# Altium PCB RcMPPT-SCC.PcbDoc (part 1 of 2)
Units mm, origin at the board's own origin, x right, y up, seen from the top; angles counter-clockwise.
Board outline 99.06 x 55.88 mm, 4 copper layers (Top Layer, Mid Layer 1, Mid Layer 2, Bottom Layer), stack 1.57 mm thick; 95 components, 80 nets, 471 pads, 150 vias.
Unrouted connection lines stored in the file: 61.
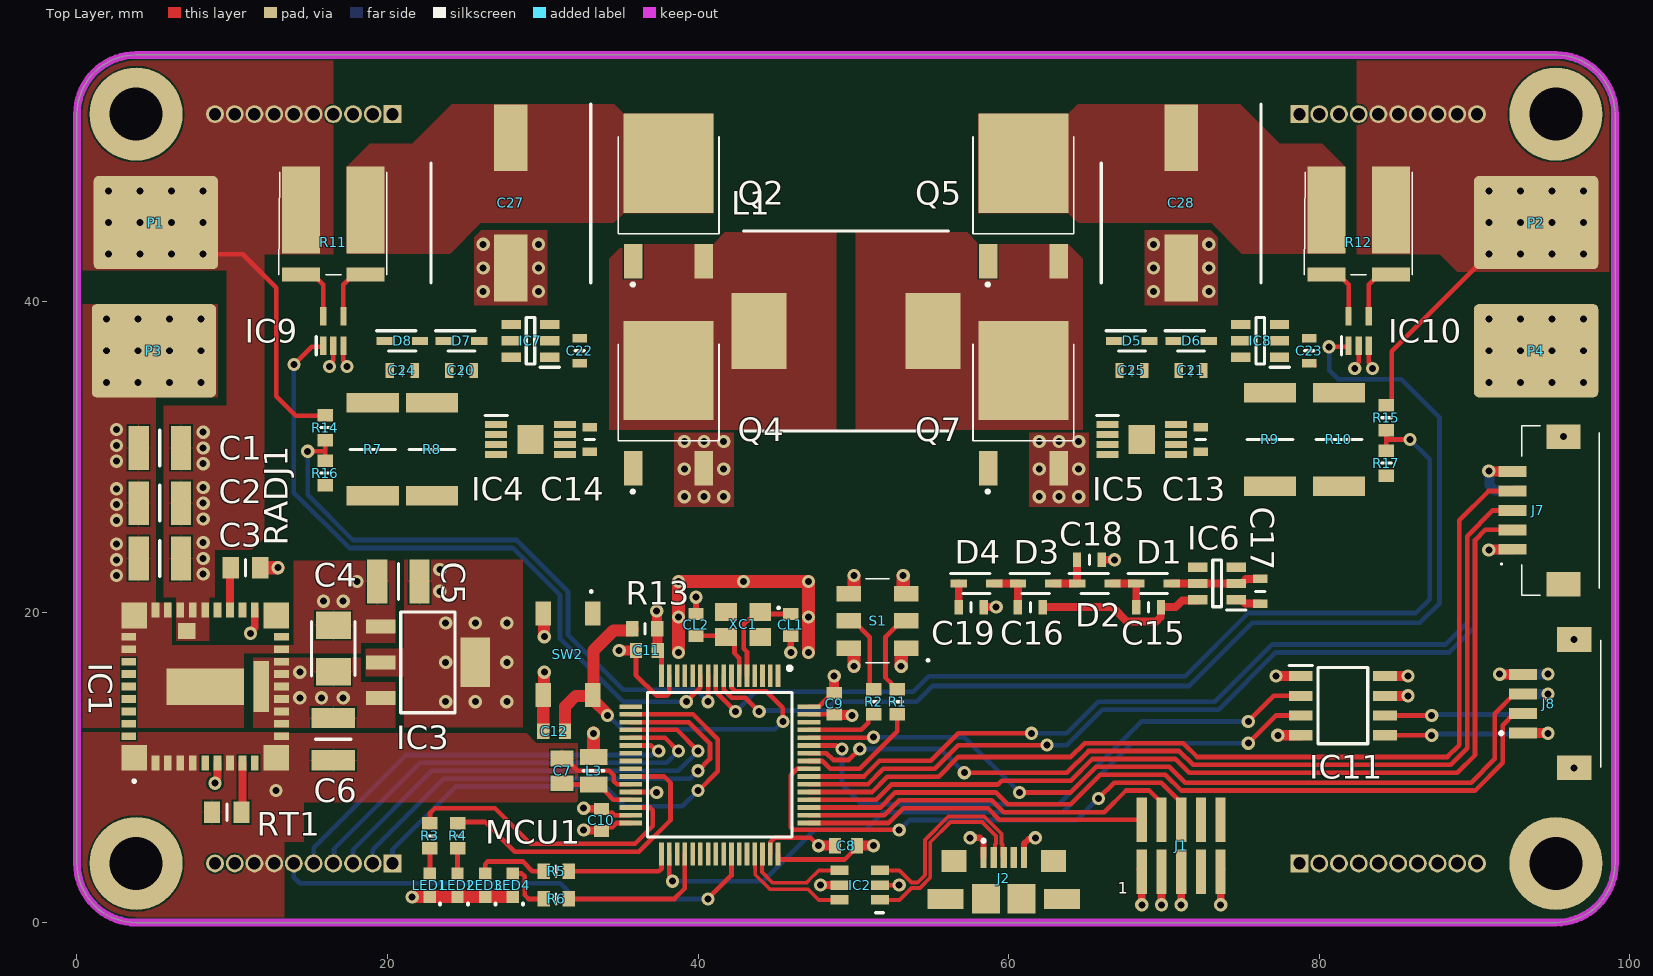
[diagram p0: Top Layer view]
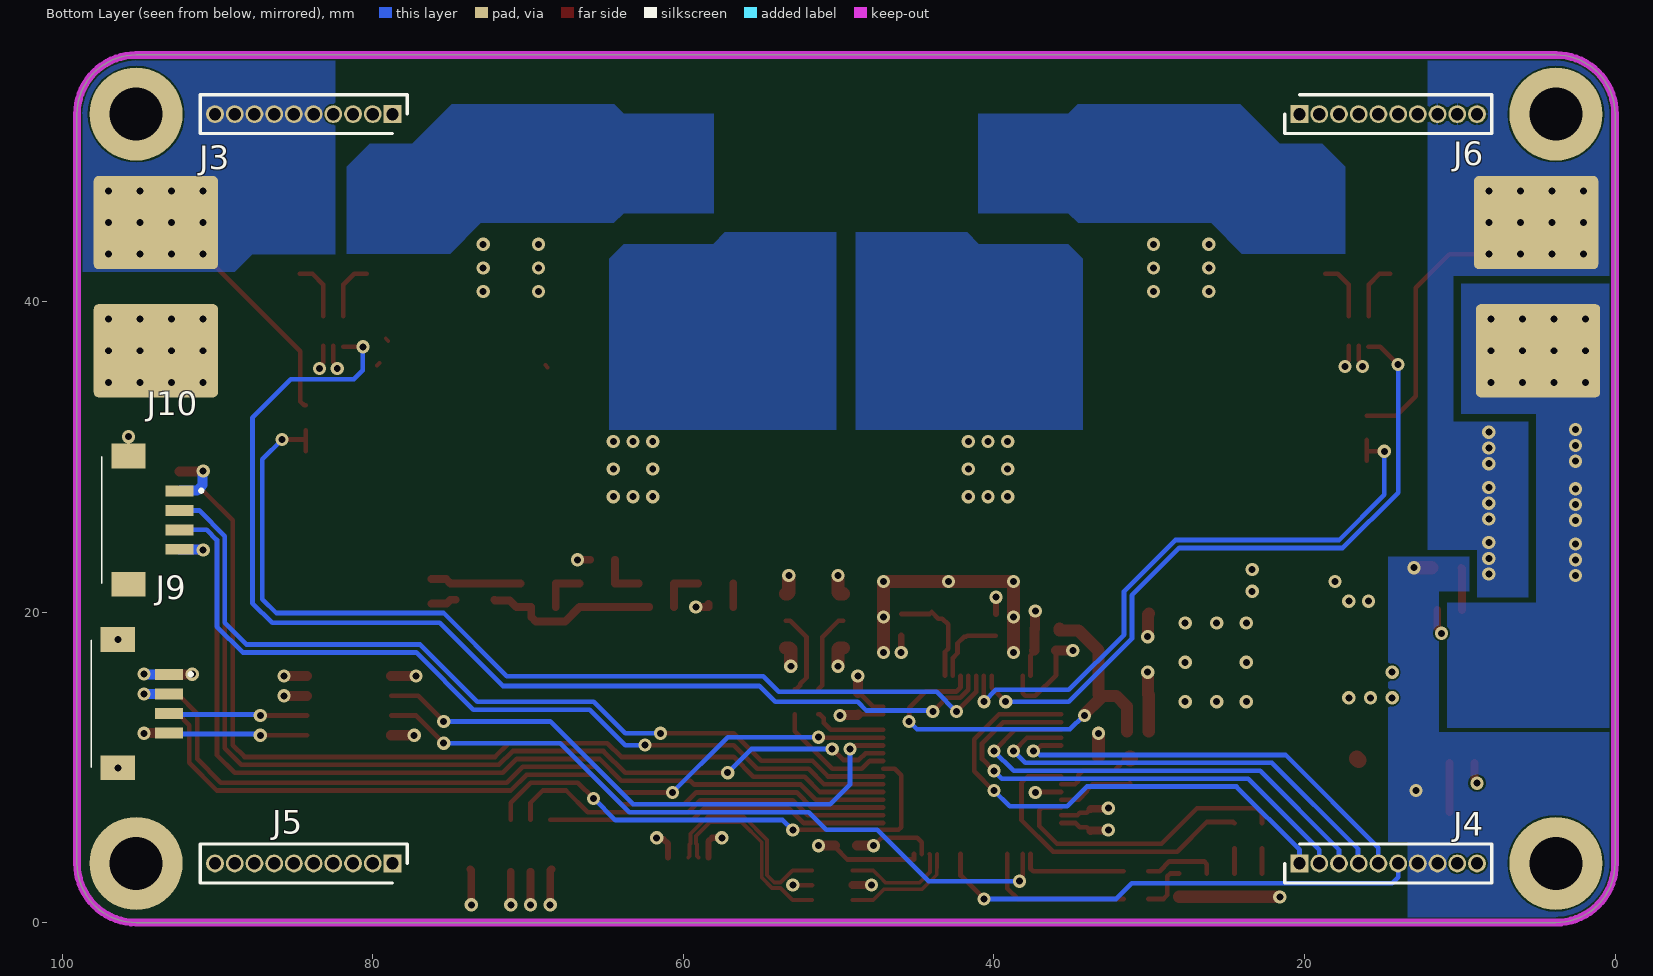
[diagram p1: Bottom Layer view, seen from below]
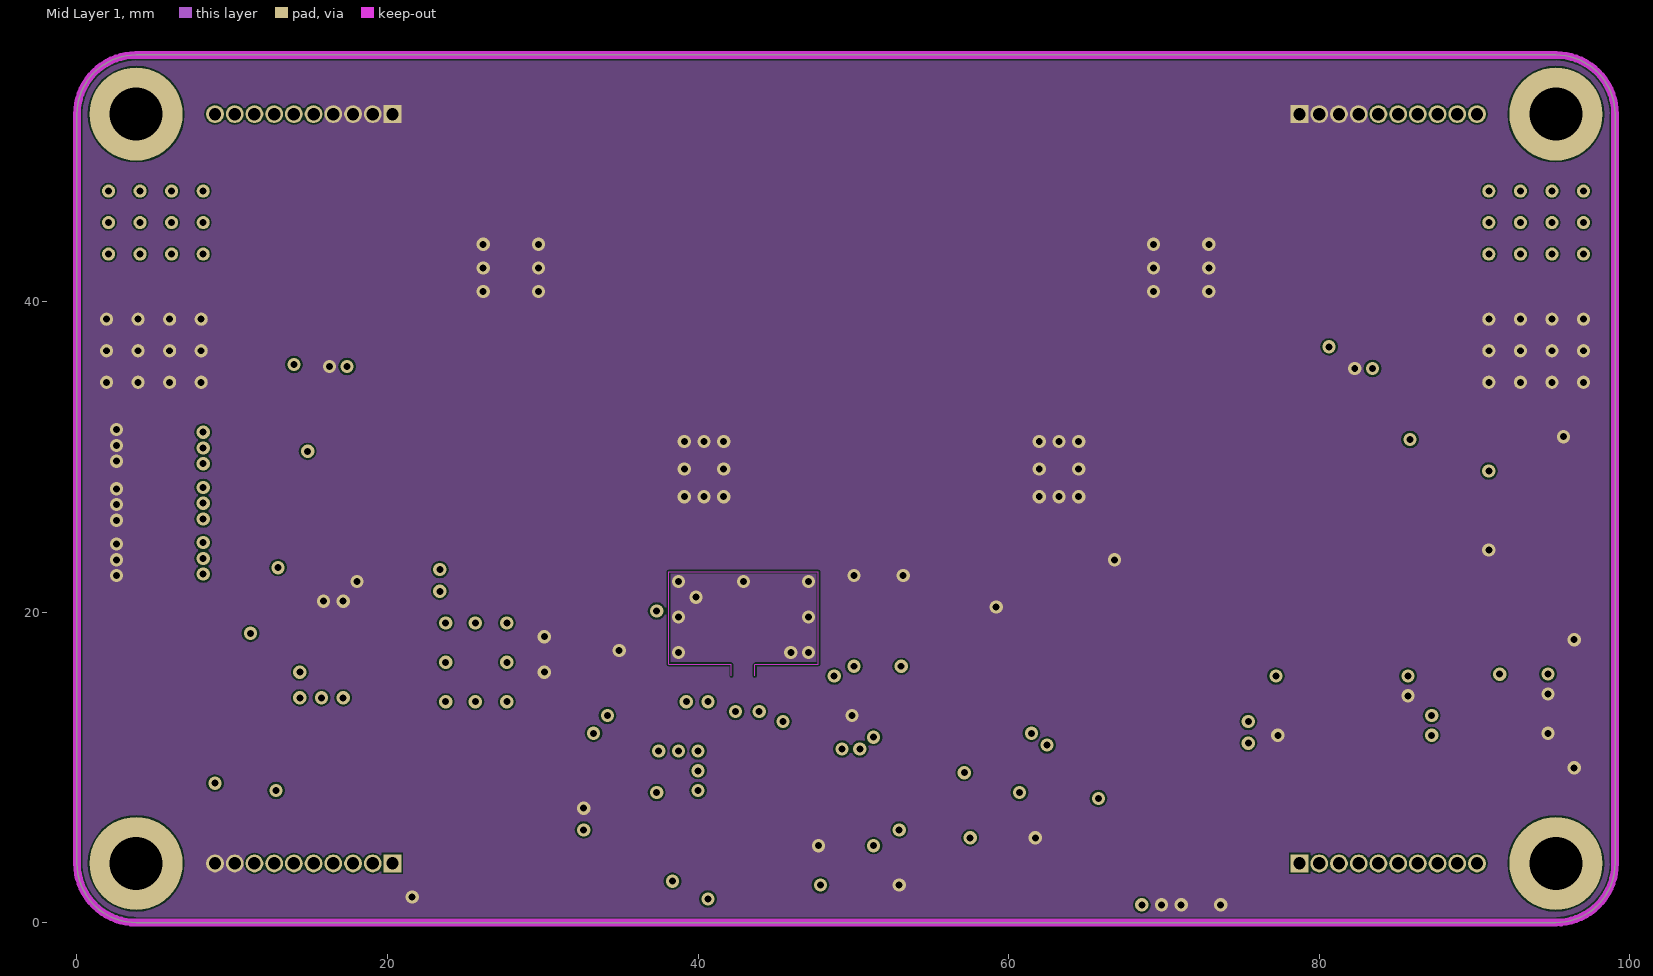
[diagram p2: Mid Layer 1]
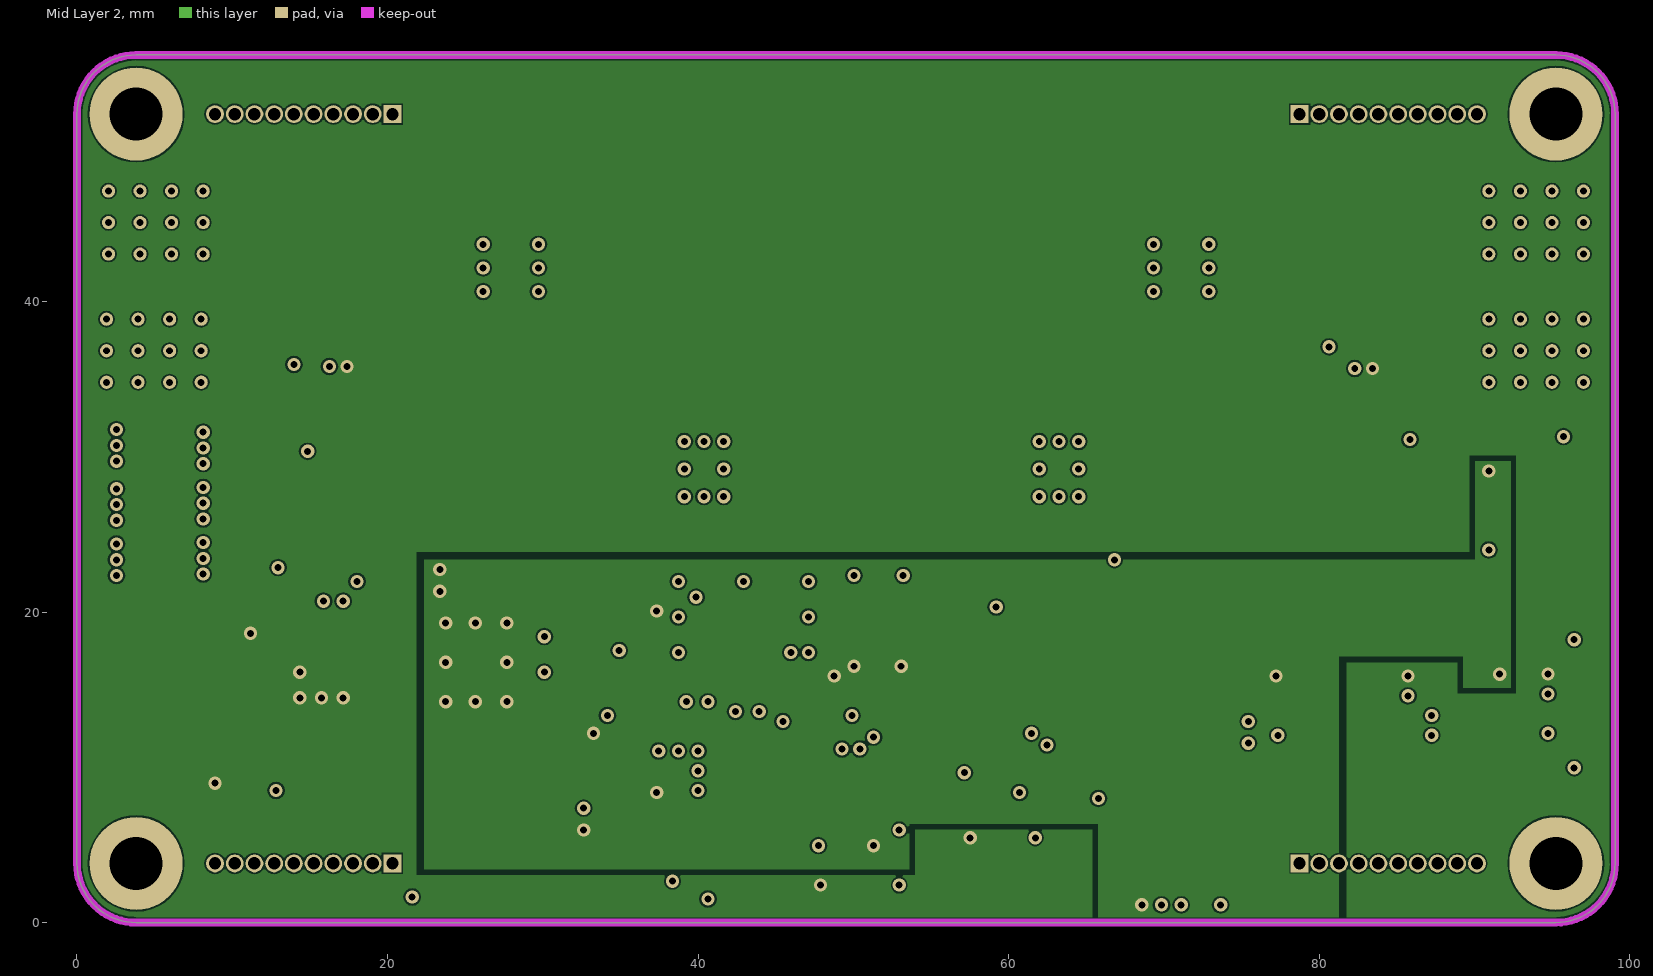
[diagram p3: Mid Layer 2]
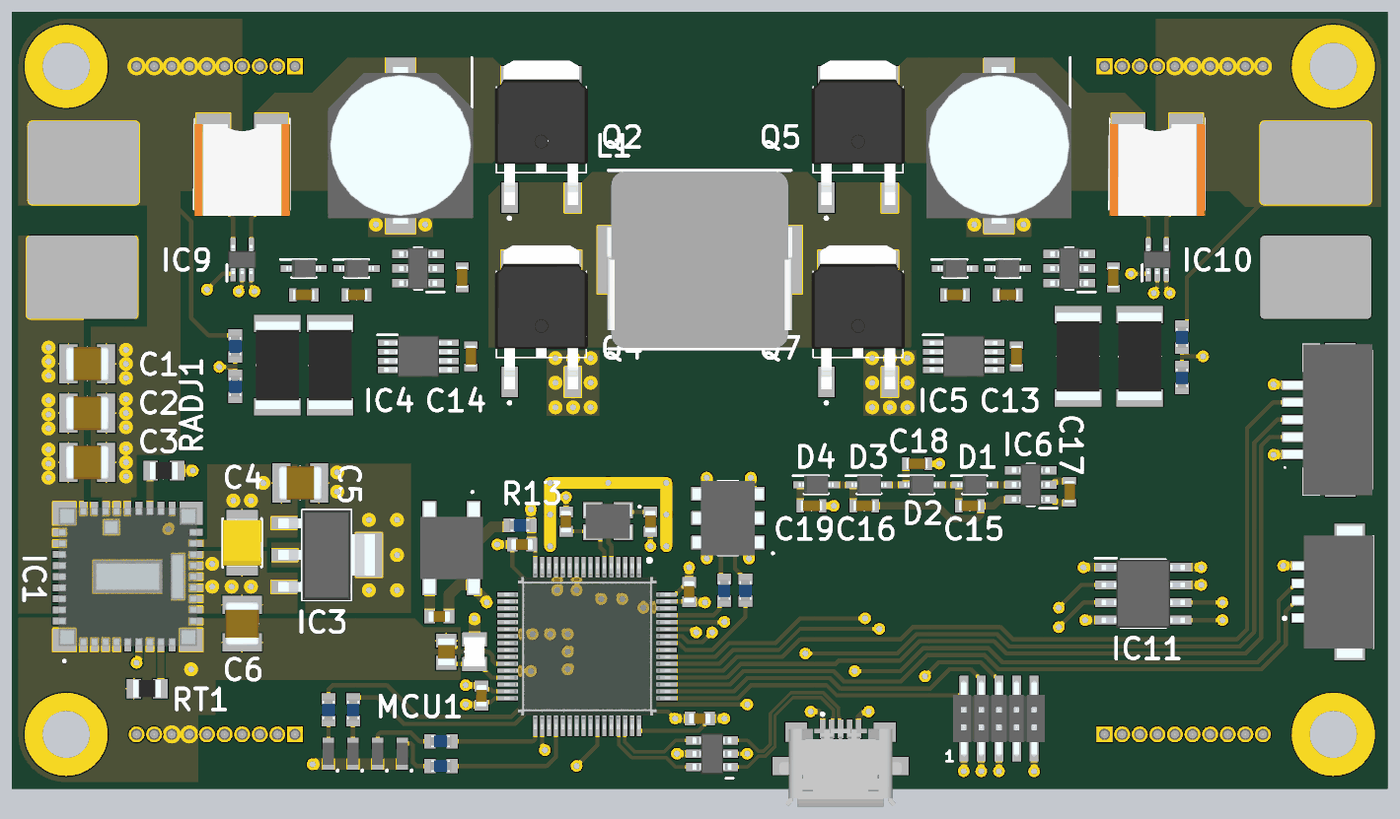
[diagram p4: 3D render of the assembled board from above, using the file's embedded part models]
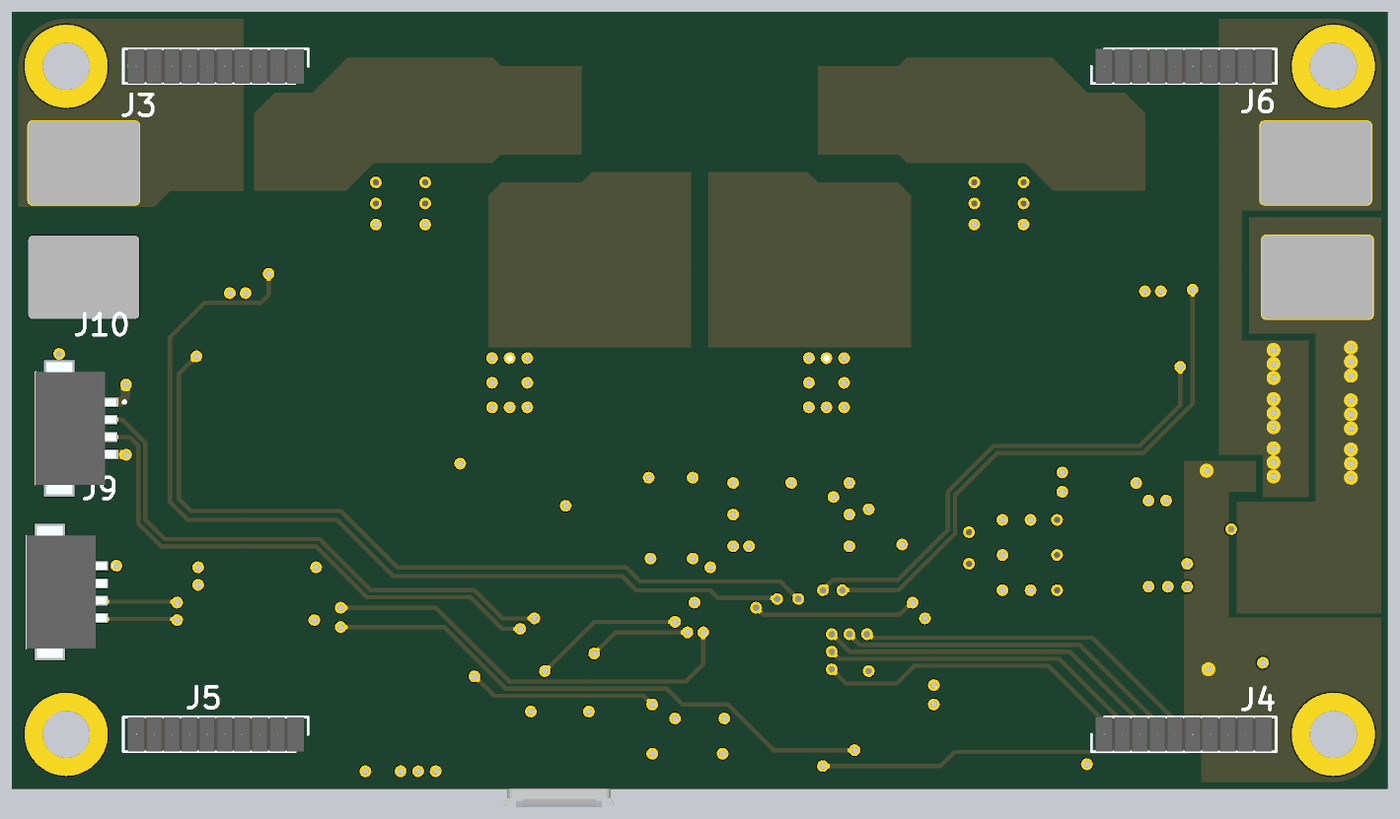
[diagram p5: 3D render of the assembled board from below, using the file's embedded part models]

## Layer stack, top to bottom
Top Solder: solder mask 0.0127, Solder Resist, Dk 3.8
Top Layer: signal copper 0.035
Dielectric 1: prepreg 0.2, 7628, Dk 4.6
Mid Layer 1: signal copper 0.0175
Core: core 1.065, FR-4, Dk 4.5
Mid Layer 2: signal copper 0.0175
Dielectric 2: prepreg 0.2, 7628, Dk 4.6
Bottom Layer: signal copper 0.035
Bottom Solder: solder mask 0.0127, Solder Resist, Dk 3.8

## Board outline
0,3.81 ccw(c3.81,3.81) 3.81,0 95.25,0 ccw(c95.25,3.81) 99.06,3.81 99.06,52.07 ccw(c95.25,52.07) 95.25,55.88 3.81,55.88 ccw(c3.81,52.07) 0,52.07

## Design rules (kind name [scope] priority, off if disabled: settings)
BoardOutlineClearance [All] p1: gap=0.2 ignorepadtopadclearanceinfootprint=FALSE
Clearance [All] p1: gap=0.102 ignorepadtopadclearanceinfootprint=FALSE except(0.127: Arc-Via Track-Via SMDPad-Via THPad-Via Via-Via Via-Fill Via-Poly Via-Region Via-Text; 0.25: Arc-Hole Track-Hole SMDPad-Hole THPad-Hole Via-Hole Fill-Hole Poly-Hole Region-Hole Text-Hole)
ComponentClearance [All] p1: gap=0.102 collisioncheckmode=3 verticalgap=0.102 showdistances=TRUE
DiffPairsRouting "Schematic Differential Pairs Routing_1" [InNet('USB-Con-D_N')] p1: maxlimit=0.254 minlimit=0.1 mostfreqgap=0.178 toplayer_minwidth=0.1 toplayer_maxwidth=0.381 toplayer_prefwidth=0.247 midlayer1_minwidth=0.1 midlayer1_maxwidth=0.381 midlayer1_prefwidth=0.247 midlayer2_minwidth=0.1 midlayer2_maxwidth=0.381 midlayer2_prefwidth=0.247 bottomlayer_minwidth=0.1 bottomlayer_maxwidth=0.381 bottomlayer_prefwidth=0.247 maxuncoupledlength=12.7
DiffPairsRouting "Schematic Differential Pairs Routing" [InNet('USB-D_P')] p2: maxlimit=0.254 minlimit=0.1 mostfreqgap=0.178 toplayer_minwidth=0.1 toplayer_maxwidth=0.381 toplayer_prefwidth=0.247 midlayer1_minwidth=0.1 midlayer1_maxwidth=0.381 midlayer1_prefwidth=0.247 midlayer2_minwidth=0.1 midlayer2_maxwidth=0.381 midlayer2_prefwidth=0.247 bottomlayer_minwidth=0.1 bottomlayer_maxwidth=0.381 bottomlayer_prefwidth=0.247 maxuncoupledlength=12.7
DiffPairsRouting [All] p3: maxlimit=0.102 minlimit=0.102 mostfreqgap=0.102 toplayer_minwidth=0.102 toplayer_maxwidth=1816.048 toplayer_prefwidth=0.102 midlayer1_minwidth=0.102 midlayer1_maxwidth=1816.048 midlayer1_prefwidth=0.102 midlayer2_minwidth=0.102 midlayer2_maxwidth=1816.048 midlayer2_prefwidth=0.102 bottomlayer_minwidth=0.102 bottomlayer_maxwidth=1816.048 bottomlayer_prefwidth=0.102 maxuncoupledlength=12.7
Height [All] p1: minheight=0 maxheight=1816.048 prefheight=12.7
HoleSize [All] p1: absolutevalues=TRUE maxlimit=6.3 minlimit=0.2 maxpercent=80.000 minpercent=20.000
HoleToHoleClearance [All] p1: gap=0.25 allowstackedmicrovias=FALSE
MinimumAnnularRing [All] p1: minimumring=0.076
MinimumSolderMaskSliver [All] p1: minsoldermaskwidth=0
PlaneClearance [All] p1: clearance=0.102
PlaneConnect PlaneConnectPowerPads [InPadClass('PowerPads')] p1: planeconnectstyle=Direct reliefexpansion=0.508 reliefentries=4 reliefconductorwidth=0.254 reliefairgap=0.254
PlaneConnect [All] p2: pad.planeconnectstyle=Relief pad.reliefexpansion=0.3 pad.reliefentries=4 pad.reliefconductorwidth=0.102 pad.reliefairgap=0.102 via.planeconnectstyle=Direct via.reliefexpansion=0.3 via.reliefentries=4 via.reliefconductorwidth=0.127 via.reliefairgap=0.127
PolygonConnect PolygonConnectPowerPads [All vs (InPadClass('PowerPads'))] p1: connectstyle=Direct reliefconductorwidth=0.254 reliefentries=4 polygonreliefangle="90 Angle" airgapwidth=0.254
PolygonConnect [All] p2: thpad.connectstyle=Relief thpad.reliefconductorwidth=0.102 thpad.reliefentries=4 thpad.polygonreliefangle="90 Angle" thpad.airgapwidth=0.102 smdpad.connectstyle=Relief smdpad.reliefconductorwidth=0.102 smdpad.reliefentries=4 smdpad.polygonreliefangle="90 Angle" smdpad.airgapwidth=0.102 via.connectstyle=Direct via.reliefconductorwidth=0.127 via.reliefentries=4 via.polygonreliefangle="90 Angle" via.airgapwidth=0.127
RoutingVias [All] p1: holewidth=0.2 width=0.45 viastyle="Through Hole" minholewidth=0.2 minwidth=0.45 maxholewidth=6.3 maxwidth=6.55
SilkToSilkClearance [All] p1: silktosilkclearance=0
SilkToSolderMaskClearance [IsPad] p1: minsilkscreentomaskgap=0.102 clearancetoexposedcopper=TRUE
SolderMaskExpansion [All] p1: expansion=0.075 istentingtop=FALSE
Width [All] p1: maxlimit=1816.048 minlimit=0.102 preferedwidth=0.102
20 further rules are at their usual default settings.

## Classes and differential pairs
component class RcMPPT-IO: IC11 J3 J4 J5 J6 J7 J8 J9 J10
component class RcMPPT-DCDC: C13 C14 C15 C16 C17 C18 C19 C20 C21 C22 C23 C24 C25 C27 C28 D1 D2 D3 D4 D5 D6 D7 D8 IC4 IC5 IC6 IC7 IC8 IC9 IC10 L1 P1 P2 P3 P4 Q2 Q4 Q5 Q7 R7 R8 R9 R10 R11 R12 R14 R15 R16 R17
component class RcMPPT-MCU: C7 C8 C9 C10 C11 C12 CL1 CL2 IC2 J1 J2 L3 LED1 LED2 LED3 LED4 MCU1 R1 R2 R3 R4 R5 R6 R13 S1 SW2 XC1
component class RcMPPT-Power_Module: C1 C2 C3 C4 C5 C6 IC1 IC3 RADJ1 RT1
differential pair USB-Con-D: +USB-Con-D_P -USB-Con-D_N
differential pair USB-D: +USB-D_P -USB-D_N

## Components (designator, comment, footprint, x,y, rotation, side; value= is the part's Value field where it differs from the comment)
C1 "10uF" CAPC3225X280N 5.334,30.57 r180 top
C2 "10uF" CAPC3225X280N 5.334,27.014 r180 top
C3 "10uF" CAPC3225X280N 5.334,23.458 r180 top
C4 "100uF" CAPPM3528X200N 16.51,17.653 r90 top
C5 "10uF" CAPC3225X280N 20.701,21.971 r180 top
C6 "10uF" CAPC3225X280N 16.51,11.811 r270 top
C7 "10nF" CAPC2012X88N 31.242,9.779 r90 top
C8 "100nF" CAPC1608X97N 49.53,4.953 r180 top
C9 "100nF" CAPC1608X97N 48.768,14.097 r270 top
C10 "100nF" CAPC1608X97N 33.782,6.604 r90 top
C11 "100nF" CAPC1608X97N 36.703,17.526 r180 top
C12 "100nF" CAPC1608X97N 30.734,12.319 r180 top
C13 "C1608X5R1E335K080AC" CAPC1608X90N 72.39,31.115 r90 top
C14 "C1608X5R1E335K080AC" CAPC1608X90N 33.02,31.115 r90 top
C15 "C1608X5R1E335K080AC" CAPC1608X90N 69.02,20.32 r180 top
C16 "C1608X5R1E335K080AC" CAPC1608X90N 61.4,20.32 r180 top
C17 "C1608X5R1E335K080AC" CAPC1608X90N 76.221,21.336 r270 top
C18 "C1608X5R1E335K080AC" CAPC1608X90N 65.21,23.368 r0 top
C19 "C1608X5R1E335K080AC" CAPC1608X90N 57.59,20.32 r0 top
C20 "C1608X5R1E335K080AC" CAPC1608X90N 24.765,35.56 r180 top
C21 "C1608X5R1E335K080AC" CAPC1608X90N 71.755,35.56 r180 top
C22 "C1608X5R1E335K080AC" CAPC1608X90N 32.385,36.83 r270 top
C23 "C1608X5R1E335K080AC" CAPC1608X90N 79.375,36.83 r270 top
C24 "C1608X5R1E335K080AC" CAPC1608X90N 20.955,35.56 r0 top
C25 "C1608X5R1E335K080AC" CAPC1608X90N 67.945,35.56 r0 top
C27 "UUX2A470MNL1GS" CAPAE1030X1050N 27.94,46.355 r270 top
C28 "UUX2A470MNL1GS" CAPAE1030X1050N 71.12,46.355 r270 top
CL1 "6.8pF" CAPC1608X87N 45.974,19.177 r90 top
CL2 "6.8pF" CAPC1608X87N 39.878,19.177 r270 top
D1 "BAS3010A03WE6327HTSA1" SOD2513X110N 69.363,21.844 r0 top
D2 "BAS3010A03WE6327HTSA1" SOD2513X110N 65.553,21.844 r0 top
D3 "BAS3010A03WE6327HTSA1" SOD2513X110N 61.743,21.844 r0 top
D4 "BAS3010A03WE6327HTSA1" SOD2513X110N 57.933,21.844 r0 top
D5 "BAS3010A03WE6327HTSA1" SOD2513X110N 67.945,37.465 r0 top
D6 "BAS3010A03WE6327HTSA1" SOD2513X110N 71.755,37.465 r0 top
D7 "BAS3010A03WE6327HTSA1" SOD2513X110N 24.765,37.465 r0 top
D8 "BAS3010A03WE6327HTSA1" SOD2513X110N 20.955,37.465 r0 top
IC1 "LMZ36002RVQT" LMZ36002RVQR 8.255,15.203 r0 top
IC2 "USBLC6-2SC6" SOT95P280X145-6N 50.419,2.413 r180 top
IC3 "AP2114H-3.3TRG1" SOT230P700X180-4N 22.606,16.764 r0 top
IC4 "LTC4444EMS8E-5#PBF" SOP65P490X110-9N 29.21,31.115 r0 top
IC5 "LTC4444EMS8E-5#PBF" SOP65P490X110-9N 68.58,31.115 r0 top
IC6 "NCP1729SN35T1G" SOT105P275X110-6N 73.427,21.844 r180 top
IC7 "NCP1729SN35T1G" SOT105P275X110-6N 29.21,37.465 r180 top
IC8 "NCP1729SN35T1G" SOT105P275X110-6N 76.2,37.465 r180 top
IC9 "INA290A2IDCKT" SOT65P210X110-5N 16.51,38.1 r90 top
IC10 "INA290A2IDCKT" SOT65P210X110-5N 82.55,38.1 r90 top
IC11 "ISO1044BDR" SOIC127P600X175-8N 81.534,13.97 r0 top
J1 "SWD" HUSSP10W40P127_2X5_635X340X420P 71.12,4.953 r0 top
J2 "Micro-USB" 19815841 59.69,1.524 r0 top
J3 "M52-040023V1045" HDRV10W60P0X127_1X10_1270X250X250P 78.74,52.07 r0 bottom locked
J4 "M52-040023V1045" HDRV10W60P0X127_1X10_1270X250X250P 20.32,3.81 r180 bottom locked
J5 "M52-040023V1045" HDRV10W60P0X127_1X10_1270X250X250P 78.74,3.81 r0 bottom locked
J6 "M52-040023V1045" HDRV10W60P0X127_1X10_1270X250X250P 20.32,52.07 r180 bottom locked
J7 "DF13A-5P-1.25H_21_" DF13A5P125H21 95.25,26.543 r270 top
J8 "DF13A-4P-1.25H_21_" DF13A4P125H21 95.631,14.097 r270 top
J9 "DF13A-4P-1.25H_21_" DF13A4P125H21 95.631,14.097 r90 bottom
J10 "DF13A-4P-1.25H_21_" DF13A4P125H21 94.95,25.918 r90 bottom
L1 "IHLP5050FDER2R2M01" INDPM132129X650N 49.53,38.1 r0 top
L3 "39nH" LQW2BAN11NG00L 33.274,9.779 r270 top
LED1 "Green" LGQ396PS35 22.733,2.413 r90 top
LED2 "Green" LGQ396PS35 24.511,2.413 r90 top
LED3 "Green" LGQ396PS35 26.289,2.413 r90 top
LED4 "Green" LGQ396PS35 28.067,2.413 r90 top
MCU1 "STM32G474RBT6" QFP50P1200X1200X160-64N 41.402,10.16 r270 top
P1 "PowerPad" POWER_PAD 5.08,45.085 r0 top
P2 "PowerPad" POWER_PAD 93.98,45.085 r0 top
P3 "PowerPad" POWER_PAD 4.953,36.83 r0 top
P4 "PowerPad" POWER_PAD 93.98,36.83 r0 top
Q2 "IPD90N10S4L06ATMA1" IPD90N10S4L06ATMA1 38.1,52.095 r0 top
Q4 "IPD90N10S4L06ATMA1" IPD90N10S4L06ATMA1 38.1,38.76 r0 top
Q5 "IPD90N10S4L06ATMA1" IPD90N10S4L06ATMA1 60.96,52.095 r0 top
Q7 "IPD90N10S4L06ATMA1" IPD90N10S4L06ATMA1 60.96,38.76 r0 top
R1 "10k" RESC1608X55N 52.832,14.224 r270 top
R2 "10k" RESC1608X55N 51.308,14.224 r270 top
R3 "1k" RESC1608X55N 22.733,5.588 r270 top
R4 "1k" RESC1608X55N 24.511,5.588 r270 top
R5 "1k" RESC1608X55N 30.861,3.302 r180 top
R6 "1k" RESC1608X55N 30.861,1.524 r180 top
R7 "CRCW25128K20JNEG" RESC6332X70N 19.05,30.48 r270 top
R8 "CRCW25128K20JNEG" RESC6332X70N 22.86,30.48 r270 top
R9 "CRCW25128K20JNEG" RESC6332X70N 76.835,31.115 r270 top
R10 "CRCW25128K20JNEG" RESC6332X70N 81.28,31.115 r270 top
R11 "WSL2726L5000FEB" WSL2726L5000FEB 16.51,43.815 r270 top
R12 "WSL2726L5000FEB" WSL2726L5000FEB 82.55,43.815 r270 top
R13 "10k" RESC1608X55N 36.576,18.923 r180 top
R14 "1k" RESC1608X55N 16.002,31.877 r270 top
R15 "1k" RESC1608X55N 84.328,32.512 r270 top
R16 "1k" RESC1608X55N 16.002,28.956 r270 top
R17 "1k" RESC1608X55N 84.328,29.591 r270 top
RADJ1 "5.05k" R0805 10.856,22.86 r0 top
RT1 "49.9k" R0805 9.652,7.112 r180 top
S1 "CAS-D20A1" CASD20A1 51.562,19.431 r90 top
SW2 "RST" PTS647SK38SMTR2LFS 31.623,17.272 r270 top
XC1 "ABM8W-24.0000MHZ-8-B1U-T3" ABM8W240000MHZ8B1UT3 42.901,19.202 r180 top

## Footprints (in the part's own frame and the unit in brackets; to place one, negate y for a bottom-side part, rotate by r counter-clockwise, add the part's x,y. Pads: shape width x height; smd on the part's side, far side on the other; paste and mask are expansions set on the pad)
19815841 [mm]
  rect 0.4x1.35 smd: 1(-1.3,2.675) 2(-0.65,2.675) 3(0,2.675) 4(0.65,2.675) 5(1.3,2.675)
  rect 1.6x1.4 smd: 6(-3.2,2.45) 7(3.2,2.45)
  rect 2.3x1.3 smd: 8(-3.75,0) 9(3.75,0)
  rect 1.8x1.9 smd: 10(-1.15,0) 11(1.15,0)
  silkscreen extent -1.4,3.65 -1.2,3.85, body extent -4.4,-2.93 4.4,2.68, height 2.8
ABM8W240000MHZ8B1UT3 [mm]
  rect 1.4x1.15 smd: 1(-1.1,-0.8) 2(1.1,-0.8) 3(1.1,0.8) 4(-1.1,0.8)
  silkscreen extent -2.34,-1.12 -2.24,-1.02, body extent -1.69,-1.26 1.69,1.26, height 0.85
CAPAE1030X1050N [mm]
  rect 4.3x2.15 smd: 1(-4.2,0) 2(4.2,0)
  silkscreen extent -6.35,-5.15 5.15,5.15, body extent -5.65,-5.25 5.65,5.25, height 10.5
CAPC1608X87N [mm]
  rect 0.78x0.98 smd: 1(-0.7,0) 2(0.7,0)
  body extent -0.8,-0.4 0.8,0.4, height 0.87
CAPC1608X90N [mm]
  rect 0.54x0.94 smd: 1(-0.8,0) 2(0.8,0)
  silkscreen extent 0,-0.3 0,0.3, body extent -0.8,-0.4 0.8,0.4, height 0.9
CAPC1608X97N [mm]
  rect 0.78x0.98 smd: 1(-0.7,0) 2(0.7,0)
  body extent -0.8,-0.4 0.8,0.4, height 0.97
CAPC2012X88N [mm]
  rect 1.02x1.47 smd: 1(-0.8,0) 2(0.8,0)
  body extent -1,-0.63 1,0.63, height 0.88
CAPC3225X280N [mm]
  rect 1.3x2.82 smd: 1(-1.36,0) 2(1.36,0)
  silkscreen extent 0,-1.15 0,1.15, body extent -1.6,-1.25 1.6,1.25, height 2.8
CAPPM3528X200N [mm]
  rect 1.75x2.25 smd: 1(-1.5,0) 2(1.5,0)
  silkscreen extent -1.78,-1.4 1.75,1.4, body extent -1.75,-1.4 1.75,1.4, height 2
CASD20A1 [mm]
  rect 1x1.6 smd: 1(-1.75,-1.85) 2(0,-1.85) 3(1.75,-1.85) 4(-1.75,1.85) 5(0,1.85) 6(1.75,1.85)
  silkscreen extent -2.7,-3.3 2.7,0.75, body extent -2.7,-2.55 2.7,2.55, height 2.6
DF13A4P125H21 [mm]
  rect 0.7x1.8 smd: 1(1.875,-2.5) 2(0.625,-2.5) 3(-0.625,-2.5) 4(-1.875,-2.5)
  rect 1.6x2.2 smd: MP1(-4.125,0.8) MP2(4.125,0.8)
  silkscreen extent -4.08,-4 4.08,2.5, body extent -4.76,-3.33 4.76,2.5, height 3.7
DF13A5P125H21 [mm]
  rect 0.7x1.8 smd: 1(2.5,-2.8) 2(1.25,-2.8) 3(0,-2.8) 4(-1.25,-2.8) 5(-2.5,-2.8)
  rect 1.6x2.2 smd: MP1(-4.75,0.5) MP2(4.75,0.5)
  silkscreen extent -5.45,-3.55 5.45,2.8, body extent -5.45,-3.63 5.45,2.8, height 3.85
HDRV10W60P0X127_1X10_1270X250X250P [mm]
  rect 1.15x1.15 hole 0.8: 1(0,0)
  round 1.15 hole 0.8: 2(1.27,0) 3(2.54,0) 4(3.81,0) 5(5.08,0) 6(6.35,0) 7(7.62,0) 8(8.89,0) 9(10.16,0) 10(11.43,0)
  silkscreen extent -0.95,-1.25 12.38,1.25, body extent -0.64,-1.25 12.06,1.25, height 2.5
HUSSP10W40P127_2X5_635X340X420P [mm]
  rect 0.65x2.85 smd: 1(-2.54,-1.675) 2(-2.54,1.675) 3(-1.27,-1.675) 4(-1.27,1.675) 5(0,-1.675) 6(0,1.675) 7(1.27,-1.675) 8(1.27,1.675) 9(2.54,-1.675) 10(2.54,1.675)
  body extent -3.32,-2.75 3.32,2.75, height 5.13
INDPM132129X650N [mm]
  rect 3.55x4.9 smd: 1(-5.6,0) 2(5.6,0)
  silkscreen extent -6.6,-6.45 6.6,6.45, body extent -6.68,-6.38 6.68,6.38, height 6.29
IPD90N10S4L06ATMA1 [mm]
  rect 1.2x2.2 smd: 1(-2.28,-9.5) 4(2.28,-9.5)
  rect 5.8x6.4 smd: 3(0,-3.2)
  silkscreen extent -3.25,-11.1 3.25,-1.5, body extent -3.36,-10.03 3.36,0.38, height 2.39
LGQ396PS35 [mm]
  rect 0.8x0.8 smd: 1(-0.75,0) 2(0.75,0)
  silkscreen extent -1.24,-0.66 -1.19,-0.66, body extent -0.8,-0.4 0.8,0.4, height 0.5
LMZ36002RVQR [mm]
  rect 1.65x1.65 smd: 1(-4.575,-4.575) 11(4.575,-4.575) 21(4.575,4.575) 31(-4.575,4.575)
  rect 0.5x0.95 smd: 2(-3.2,-4.925) 3(-2.4,-4.925) 4(-1.6,-4.925) 5(-0.8,-4.925) 6(0,-4.925) 7(0.8,-4.925) 8(1.6,-4.925) 9(2.4,-4.925) 10(3.2,-4.925) 22(3.2,4.925) 23(2.4,4.925) 24(1.6,4.925) 25(0.8,4.925) 26(0,4.925) 27(-0.8,4.925) 28(-1.6,4.925) 29(-2.4,4.925) 30(-3.2,4.925)
  rect 0.95x0.5 smd: 12(4.925,-3.2) 13(4.925,-2.4) 14(4.925,-1.6) 15(4.925,-0.8) 16(4.925,0) 17(4.925,0.8) 18(4.925,1.6) 19(4.925,2.4) 20(4.925,3.2) 32(-4.925,3.2) 33(-4.925,2.4) 34(-4.925,1.6) 35(-4.925,0.8) 36(-4.925,0) 37(-4.925,-0.8) 38(-4.925,-1.6) 39(-4.925,-2.4) 40(-4.925,-3.2)
  rect 5x2.35 smd: 41(0,0)
  rect 1.12x1.05 smd: 42(-1.187,3.575)
  rect 1x3.3 smd: 43(3.6,0)
  silkscreen extent -4.62,-6.15 -4.52,-6.05, body extent -5,-5 5,5, height 2.23
LQW2BAN11NG00L [mm]
  rect 1.02x1.78 smd: 1(-0.89,0) 2(0.89,0)
  silkscreen extent 0,-0.66 0,0.66, body extent -1.04,-0.76 1.04,0.76, height 1.52
POWER_PAD [mm]
  round 0.85 hole 0.45: 1(-3.048,-2.032) 1(-3.048,0) 1(-3.048,2.032) 1(-1.016,-2.032) 1(-1.016,0) 1(-1.016,2.032) 1(1.016,-2.032) 1(1.016,0) 1(1.016,2.032) 1(3.048,-2.032) 1(3.048,0) 1(3.048,2.032)
  rrect10% 8x6 smd: 1(0,0)
  rrect10% 8x6 smd far side: 1(0,0)
PTS647SK38SMTR2LFS [mm]
  rect 1.55x1 smd: 1(-2.625,1.6) 2(2.625,1.6) 3(-2.625,-1.6) 4(2.625,-1.6)
  silkscreen extent -4.1,1.45 -4,1.55, body extent -3.3,-2.25 3.3,2.25, height 3.9
QFP50P1200X1200X160-64N [mm]
  rect 1.475x0.3 smd: 1(-5.738,3.75) 2(-5.738,3.25) 3(-5.738,2.75) 4(-5.738,2.25) 5(-5.738,1.75) 6(-5.738,1.25) 7(-5.738,0.75) 8(-5.738,0.25) 9(-5.738,-0.25) 10(-5.738,-0.75) 11(-5.738,-1.25) 12(-5.738,-1.75) 13(-5.738,-2.25) 14(-5.738,-2.75) 15(-5.738,-3.25) 16(-5.738,-3.75) 33(5.738,-3.75) 34(5.738,-3.25) 35(5.738,-2.75) 36(5.738,-2.25) 37(5.738,-1.75) 38(5.738,-1.25) 39(5.738,-0.75) 40(5.738,-0.25) 41(5.738,0.25) 42(5.738,0.75) 43(5.738,1.25) 44(5.738,1.75) 45(5.738,2.25) 46(5.738,2.75) 47(5.738,3.25) 48(5.738,3.75)
  rect 0.3x1.475 smd: 17(-3.75,-5.738) 18(-3.25,-5.738) 19(-2.75,-5.738) 20(-2.25,-5.738) 21(-1.75,-5.738) 22(-1.25,-5.738) 23(-0.75,-5.738) 24(-0.25,-5.738) 25(0.25,-5.738) 26(0.75,-5.738) 27(1.25,-5.738) 28(1.75,-5.738) 29(2.25,-5.738) 30(2.75,-5.738) 31(3.25,-5.738) 32(3.75,-5.738) 49(3.75,5.738) 50(3.25,5.738) 51(2.75,5.738) 52(2.25,5.738) 53(1.75,5.738) 54(1.25,5.738) 55(0.75,5.738) 56(0.25,5.738) 57(-0.25,5.738) 58(-0.75,5.738) 59(-1.25,5.738) 60(-1.75,5.738) 61(-2.25,5.738) 62(-2.75,5.738) 63(-3.25,5.738) 64(-3.75,5.738)
  silkscreen extent -6.35,-4.65 4.65,4.65, body extent -6,-6 6,6, height 1.6
R0805 [mm]
  rect 1.05x1.4 smd: 1(-0.95,0) 2(0.95,0)
  silkscreen extent 0,-0.53 0,0.53, body extent -1,-0.63 1,0.63, height 0.7
RESC1608X55N [mm]
  rect 0.8x1 smd: 1(-0.8,0) 2(0.8,0)
  silkscreen extent 0,-0.33 0,0.33, body extent -0.75,-0.43 0.8,0.43, height 0.45
RESC6332X70N [mm]
  rect 1.25x3.35 smd: 1(-3,0) 2(3,0)
  silkscreen extent 0,-1.48 0,1.48, body extent -3.15,-1.58 3.15,1.58, height 0.7
SOD2513X110N [mm]
  rect 1.05x0.5 smd: 1(-1.138,0) 2(1.138,0)
  silkscreen extent -1.66,-0.65 0.87,0.65, body extent -1.25,-0.65 1.25,0.65, height 1.1
SOIC127P600X175-8N [mm]
  rect 1.525x0.65 smd: 1(-2.712,1.905) 2(-2.712,0.635) 3(-2.712,-0.635) 4(-2.712,-1.905) 5(2.712,-1.905) 6(2.712,-0.635) 7(2.712,0.635) 8(2.712,1.905)
  silkscreen extent -3.47,-2.45 1.6,2.58, body extent -3,-2.45 3,2.45, height 1.75
SOP65P490X110-9N [mm]
  rect 1.425x0.45 smd: 1(-2.212,0.975) 2(-2.212,0.325) 3(-2.212,-0.325) 4(-2.212,-0.975) 5(2.212,-0.975) 6(2.212,-0.325) 7(2.212,0.325) 8(2.212,0.975)
  rect 1.68x1.88 smd: 9(0,0)
  silkscreen extent -2.93,1.55 -1.5,1.55, body extent -2.45,-1.5 2.45,1.5, height 1.1
SOT65P210X110-5N [mm]
  rect 1.2x0.4 smd: 1(-0.95,0.65) 2(-0.95,0) 3(-0.95,-0.65) 4(0.95,-0.65) 5(0.95,0.65)
  silkscreen extent -1.55,1.1 -0.35,1.1, body extent -1.05,-1 1.05,1, height 1.1
SOT95P280X145-6N [mm]
  rect 1.15x0.6 smd: 1(-1.3,0.95) 2(-1.3,0) 3(-1.3,-0.95) 4(1.3,-0.95) 5(1.3,0) 6(1.3,0.95)
  silkscreen extent -1.52,1.78 -1.02,1.78, body extent -1.4,-1.46 1.4,1.46, height 1.45
SOT105P275X110-6N [mm]
  rect 1.25x0.6 smd: 1(-1.25,1.05) 2(-1.25,0) 3(-1.25,-1.05) 4(1.25,-1.05) 5(1.25,0) 6(1.25,1.05)
  silkscreen extent -1.88,-1.5 0.28,1.7, body extent -1.38,-1.5 1.38,1.5, height 1.1
SOT230P700X180-4N [mm]
  rect 1.9x0.9 smd: 1(-3.05,2.3) 2(-3.05,0) 3(-3.05,-2.3)
  rect 1.9x3.2 smd: 4(3.05,0)
  silkscreen extent -1.75,-3.25 1.75,3.25, body extent -3.5,-3.25 3.5,3.25, height 1.8
WSL2726L5000FEB [mm]
  rect 5.6x2.44 smd: 1(-2.067,-2.08) 2(-2.067,2.08)
  rect 0.89x2.44 smd: 3(2.067,-2.08) 4(2.067,2.08)
  silkscreen extent -4.5,-3.5 2.1,3.45, body extent -4.06,-3.45 2.54,3.45, height 3.01

## Part data
C1 C2 C3 C5 C6: library part CL32B106KMVNNWE, "Capacitor", Manufacturer_Name="Samsung Electro-Mechanics", Mouser Part Number=N/A, Arrow Part Number=CL32B106KMVNNWE, Arrow Price/Stock=https://www.arrow.com/en/products/cl32b106kmvnnwe/samsung-electro-mechanics, Datasheet Link=https://www.arrow.com/en/products/cl32b106kmvnnwe/samsung-electro-mechanics, Height=2.8mm, Manufacturer_Part_Number=CL32B106KMVNNWE, Mouser Price/Stock=https://www.mouser.co.uk/ProductDetail/Samsung-Electro-Mechanics/CL32B106KMVNNWE?qs=xZ%2FP%252Ba9zWqaEMBbSgKy8gQ%3D%3D
C4: library part 8TPE100MAZB, "Capacitor Polarised", Manufacturer_Name=Panasonic, Mouser Part Number=667-8TPE100MAZB, Arrow Part Number=8TPE100MAZB, Arrow Price/Stock=https://www.arrow.com/en/products/8tpe100mazb/panasonic, Datasheet Link=http://uk.rs-online.com/web/p/products/7887374, Height=2mm, Manufacturer_Part_Number=8TPE100MAZB, Mouser Price/Stock=https://www.mouser.co.uk/ProductDetail/Panasonic/8TPE100MAZB?qs=OE1iw1LrrPHKTwwfsidxgA%3D%3D
C7: library part C0805C103J3GACTU, "Capacitor", Manufacturer_Name=Kemet, Mouser Part Number=80-C0805C103J3G, Arrow Part Number=C0805C103J3GACTU, Arrow Price/Stock=https://www.arrow.com/en/products/c0805c103j3gactu/kemet-corporation, Datasheet Link=https://componentsearchengine.com/Datasheets/2/C0805C103J3GACTU.pdf, Height=0.88mm, Manufacturer_Part_Number=C0805C103J3GACTU, Mouser Price/Stock=https://www.mouser.co.uk/ProductDetail/KEMET/C0805C103J3GACTU?qs=K%2Fj%2Fqf%252B0fqJFcB%2FiaHub0Q%3D%3D
C8 C9 C10 C11 C12: library part VJ0603Y104JXJAC, "Capacitor", Manufacturer_Name=Vishay, Mouser Part Number=77-VJ0603Y104JXJAC, Datasheet Link=http://www.vishay.com/docs/45226/vj31xrohsautomlcc.pdf, Height=0.97mm, Manufacturer_Part_Number=VJ0603Y104JXJAC, Mouser Price/Stock=https://www.mouser.com/Search/Refine.aspx?Keyword=77-VJ0603Y104JXJAC
C13 C14 C15 C16 C17 C18 C19 C20 C21 C22 C23 C24 C25: "Capacitor", Manufacturer_Name=TDK, Mouser Part Number=810-C1608X5R1E335KAC, Arrow Part Number=C1608X5R1E335K080AC, Arrow Price/Stock=https://www.arrow.com/en/products/c1608x5r1e335k080ac/tdk, Datasheet Link=https://product.tdk.com/info/en/catalog/datasheets/mlcc_commercial_midvoltage_en.pdf, Height=0.9mm, Manufacturer_Part_Number=C1608X5R1E335K080AC, Mouser Price/Stock=https://www.mouser.com/Search/Refine.aspx?Keyword=810-C1608X5R1E335KAC
C27 C28: "Capacitor Polarised", Manufacturer_Name=Nichicon, Mouser Part Number=647-UUX2A470MNL1GS, Arrow Part Number=UUX2A470MNL1GS, Arrow Price/Stock=https://www.arrow.com/en/products/uux2a470mnl1gs/nichicon, Datasheet Link=https://componentsearchengine.com/Datasheets/1/UUX2A470MNL1GS.pdf, Height=10.5mm, Manufacturer_Part_Number=UUX2A470MNL1GS, Mouser Price/Stock=https://www.mouser.co.uk/ProductDetail/Nichicon/UUX2A470MNL1GS?qs=jZZh9D7uMhmPZMofMKn2Fg%3D%3D
CL1 CL2: library part C0603C689C5GACTU, "Capacitor", Manufacturer_Name=Kemet, Mouser Part Number=80-C0603C689C5G, Arrow Part Number=C0603C689C5GACTU, Arrow Price/Stock=https://www.arrow.com/en/products/c0603c689c5gactu/kemet-corporation, Datasheet Link=http://docs-emea.rs-online.com/webdocs/116e/0900766b8116eaf8.pdf, Height=0.87mm, Manufacturer_Part_Number=C0603C689C5GACTU, Mouser Price/Stock=https://www.mouser.com/Search/Refine.aspx?Keyword=80-C0603C689C5G
D1 D2 D3 D4 D5 D6 D7 D8: "Diode", Manufacturer_Name=Infineon, Mouser Part Number=726-BAS3010A-03WE6, Arrow Part Number=BAS3010A03WE6327HTSA1, Arrow Price/Stock=https://www.arrow.com/en/products/bas3010a03we6327htsa1/infineon-technologies-ag, Datasheet Link=https://www.infineon.com/dgdl/Infineon-BAS3010ASERIES-DS-v01_01-en.pdf?fileId=db3a30431ddc9372011dfbc50f231c06, Height=1.1mm, Manufacturer_Part_Number=BAS3010A03WE6327HTSA1, Mouser Price/Stock=https://www.mouser.co.uk/ProductDetail/Infineon-Technologies/BAS3010A03WE6327HTSA1?qs=K00xGehIljtEbk1%252B2pLZ%252BQ%3D%3D
IC1: "Integrated Circuit", Manufacturer_Name="Texas Instruments", Mouser Part Number=595-LMZ36002RVQT, Arrow Part Number=LMZ36002RVQT, Arrow Price/Stock=https://www.arrow.com/en/products/lmz36002rvqt/texas-instruments, Datasheet Link=http://www.ti.com/lit/gpn/lmz36002, Height=2.13mm, Manufacturer_Part_Number=LMZ36002RVQT, Mouser Price/Stock=https://www.mouser.co.uk/ProductDetail/Texas-Instruments/LMZ36002RVQT?qs=kFLL9AfgRSBjXTxBMSjGOw%3D%3D
IC2: "Integrated Circuit", Manufacturer_Name=STMicroelectronics, Mouser Part Number=511-USBLC6-2SC6, Arrow Part Number=USBLC6-2SC6, Arrow Price/Stock=https://www.arrow.com/en/products/usblc6-2sc6/stmicroelectronics, Datasheet Link=http://www.st.com/st-web-ui/static/active/en/resource/technical/document/datasheet/CD00050750.pdf, Height=1.45mm, Manufacturer_Part_Number=USBLC6-2SC6, Mouser Price/Stock=https://www.mouser.co.uk/ProductDetail/STMicroelectronics/USBLC6-2SC6?qs=po45yt2pPpu%2FhNIlwQdTlg%3D%3D
IC3: "Integrated Circuit", Manufacturer_Name="Diodes Inc.", Mouser Part Number=621-AP2114H-3.3TRG1, Arrow Part Number=AP2114H-3.3TRG1, Arrow Price/Stock=https://www.arrow.com/en/products/ap2114h-3.3trg1/diodes-incorporated, Datasheet Link=http://uk.rs-online.com/web/p/products/8283528, Height=1.8mm, Manufacturer_Part_Number=AP2114H-3.3TRG1, Mouser Price/Stock=https://www.mouser.co.uk/ProductDetail/Diodes-Incorporated/AP2114H-33TRG1?qs=x6A8l6qLYDDSG%2FfwzcsOhw%3D%3D
IC4 IC5: "Integrated Circuit", Manufacturer_Name="Linear Technology", Mouser Part Number=584-C4444EMS8E-5PBF, Arrow Part Number=LTC4444EMS8E-5#PBF, Arrow Price/Stock=https://www.arrow.com/en/products/ltc4444ems8e-5pbf/linear-technology, Datasheet Link=http://www.linear.com/docs/26366, Height=1.1mm, Manufacturer_Part_Number=LTC4444EMS8E-5#PBF, Mouser Price/Stock=https://www.mouser.com/Search/Refine.aspx?Keyword=584-C4444EMS8E-5PBF
IC6 IC7 IC8: "Integrated Circuit", Manufacturer_Name="ON Semiconductor", Mouser Part Number=863-NCP1729SN35T1G, Arrow Part Number=NCP1729SN35T1G, Arrow Price/Stock=https://www.arrow.com/en/products/ncp1729sn35t1g/on-semiconductor, Datasheet Link=http://www.onsemi.com/pub/Collateral/NCP1729-D.PDF, Height=1.1mm, Manufacturer_Part_Number=NCP1729SN35T1G, Mouser Price/Stock=https://www.mouser.co.uk/ProductDetail/ON-Semiconductor/NCP1729SN35T1G?qs=%2FugrpAKHX8pjfXPiRUErOw%3D%3D
IC9 IC10: "Integrated Circuit", Manufacturer_Name="Texas Instruments", Mouser Part Number=595-INA290A2IDCKT, Datasheet Link=https://www.ti.com/lit/ds/symlink/ina290.pdf?ts=1605766072094&ref_url=https%253A%252F%252Fwww.ti.com%252Fstore%252Fti%252Fen%252Fp%252Fproduct%252F%253Fp%253DINA290A2IDCKT, Height=1.1mm, Manufacturer_Part_Number=INA290A2IDCKT, Mouser Price/Stock=https://www.mouser.co.uk/ProductDetail/Texas-Instruments/INA290A2IDCKT/?qs=sPbYRqrBIVkkx%2FoqcXF%2FVw%3D%3D
IC11: "Integrated Circuit", Manufacturer_Name="Texas Instruments", Mouser Part Number=595-ISO1044BDR, Datasheet Link=http://www.ti.com/lit/gpn/iso1044?HQS=ti-null-null-sf-df-pf-sep-wwe&DCM=yes, Height=1.75mm, Manufacturer_Part_Number=ISO1044BDR, Mouser Price/Stock=https://www.mouser.co.uk/ProductDetail/Texas-Instruments/ISO1044BDR/?qs=DuoOggApuK9UGD9QQWYeTA%3D%3D
J1: library part M50-3600542R, "Connector", Manufacturer_Name=Harwin, Mouser Part Number=855-M50-3600542R, Datasheet Link=https://cdn.harwin.com/pdfs/M50-360R.pdf, Manufacturer_Part_Number=M50-3600542R, Mouser Price/Stock=https://www.mouser.co.uk/ProductDetail/Harwin/M50-3600542R?qs=DVxm2sPGGrrPu%2FxuhpV3yw%3D%3D
J2: library part 1981584-1, "Connector", Manufacturer_Name="TE Connectivity", Mouser Part Number=571-1981584-1, Arrow Part Number=1981584-1, Arrow Price/Stock=https://www.arrow.com/en/products/1981584-1/te-connectivity, Datasheet Link=http://www.te.com/commerce/DocumentDelivery/DDEController?Action=showdoc&DocId=Customer+Drawing%7F1981584%7FD2%7Fpdf%7FEnglish%7FENG_CD_1981584_D2.pdf%7F1981584-1, Height=3mm, Manufacturer_Part_Number=1981584-1, Mouser Price/Stock=https://www.mouser.co.uk/ProductDetail/TE-Connectivity/1981584-1?qs=ozkTL%2FUej0TLYxjQLPnd2Q%3D%3D
J3 J4 J5 J6: "Connector", Manufacturer_Name=Harwin, Mouser Part Number=855-M52-040023V1045, Datasheet Link=https://componentsearchengine.com/Datasheets/2/M52-040023V1045.pdf, Height=2.5mm, Manufacturer_Part_Number=M52-040023V1045, Mouser Price/Stock=https://www.mouser.co.uk/ProductDetail/Harwin/M52-040023V1045?qs=wuXwK9wHm9uI6z1%2FRhsKmg%3D%3D
J7: "Connector", Manufacturer_Name=Hirose, Manufacturer_Part_Number=DF13A-5P-1.25H(21), Mouser Part Number=798-DF13A5P125H21, Datasheet Link=https://componentsearchengine.com/Datasheets/1/DF13A-5P-1.25H(21).pdf, Height=3.75mm, Mouser Price/Stock=https://www.mouser.co.uk/ProductDetail/Hirose-Connector/DF13A-5P-125H21?qs=XQjbzJWzFPWvJsE2o%252B4Q8Q%3D%3D
J8 J9 J10: "Connector", Manufacturer_Name=Hirose, Manufacturer_Part_Number=DF13A-4P-1.25H(21), Mouser Part Number=798-DF13A4P125H21, Datasheet Link=https://componentsearchengine.com/Datasheets/1/DF13A-4P-1.25H(21).pdf, Height=3.6mm, Mouser Price/Stock=https://www.mouser.co.uk/ProductDetail/Hirose-Connector/DF13A-4P-125H21?qs=XQjbzJWzFPXWzMShI70F0w%3D%3D
L1: "Inductor", Manufacturer_Name=Vishay, Mouser Part Number=70-IHLP5050FDER2R2M1, Arrow Part Number=IHLP5050FDER2R2M01, Arrow Price/Stock=https://www.arrow.com/en/products/ihlp5050fder2r2m01/vishay, Datasheet Link=http://uk.rs-online.com/web/p/products/7487448P, Height=6.5mm, Manufacturer_Part_Number=IHLP5050FDER2R2M01, Mouser Price/Stock=https://www.mouser.co.uk/ProductDetail/Vishay-Dale/IHLP5050FDER2R2M01?qs=bGpylJ3EYaCbgSSjAcbJVQ%3D%3D
L3: library part LQW2BAS39NJ00L, "Inductor", Manufacturer_Name="Murata Electronics", Datasheet Link=https://psearch.en.murata.com/inductor/product/LQW2BAS39NJ00%23.html, Height=1.52mm, Manufacturer_Part_Number=LQW2BAS39NJ00L
LED1 LED2 LED3 LED4: library part LG_Q396-PS-35, "LED", Arrow Part Number="LG Q396-PS-35", Manufacturer_Name=OSRAM, Mouser Part Number=720-LGQ396A3964, Arrow Price/Stock=https://www.arrow.com/en/products/lgq396-ps-35/osram-opto-semiconductors, Datasheet Link=https://mouser.componentsearchengine.com/Datasheets/2/LG%20Q396-PS-35.pdf, Height=0.4mm, Manufacturer_Part_Number="LG Q396-PS-35", Mouser Price/Stock=https://www.mouser.co.uk/ProductDetail/OSRAM-Opto-Semiconductors/LG-Q396-PS-35?qs=xC%252BE9h5iuX5%252BCocujXxOpw%3D%3D
MCU1: "Integrated Circuit", Manufacturer_Name=STMicroelectronics, Mouser Part Number=511-STM32G474RBT6, Datasheet Link=https://www.mouser.com/datasheet/2/389/stm32g474cb-1600828.pdf, Height=1.6mm, Manufacturer_Part_Number=STM32G474RBT6, Mouser Price/Stock=https://www.mouser.co.uk/ProductDetail/STMicroelectronics/STM32G474RBT6?qs=uwxL4vQweFP0uAZUZXLBhQ%3D%3D
Q2 Q4 Q5 Q7: "MOSFET (N-Channel)", Manufacturer_Name=Infineon, Mouser Part Number=726-IPD90N10S4L06ATM, Arrow Part Number=IPD90N10S4L06ATMA1, Arrow Price/Stock=https://www.arrow.com/en/products/ipd90n10s4l06atma1/infineon-technologies-ag, Datasheet Link=https://www.infineon.com/dgdl/Infineon-IPD90N10S4L_06-DS-v01_00-en.pdf?fileId=db3a3043372d5cc80137500063630512, Height=2mm, Manufacturer_Part_Number=IPD90N10S4L06ATMA1, Mouser Price/Stock=https://www.mouser.co.uk/ProductDetail/Infineon-Technologies/IPD90N10S4L06ATMA1?qs=LxJ0xX%2FWJR62lwU%2FrihEDA%3D%3D
R1 R2 R13: library part MCT06030C1002FP500, "Resistor", Manufacturer_Name=Vishay, Mouser Part Number=594-MCT06030C1002FP5, Datasheet Link=http://www.vishay.com/docs/28705/mcx0x0xpro.pdf, Height=0.55mm, Manufacturer_Part_Number=MCT06030C1002FP500, Mouser Price/Stock=https://www.mouser.co.uk/ProductDetail/Vishay-Beyschlag/MCT06030C1002FP500?qs=Wvg1umJc15zoHgIjwqoGHw%3D%3D
R3 R4 R5 R6 R14 R15 R16 R17: library part MCT06030C1001FP500, "Resistor", Manufacturer_Name=Vishay, Mouser Part Number=594-MCT06030C1001FP5, Datasheet Link=http://www.vishay.com/docs/28705/mcx0x0xpro.pdf, Height=0.55mm, Manufacturer_Part_Number=MCT06030C1001FP500, Mouser Price/Stock=https://www.mouser.co.uk/ProductDetail/Vishay-Beyschlag/MCT06030C1001FP500?qs=7ZE6F4QMOBbsjeUdqW8cwA%3D%3D
R7 R8 R9 R10: "Resistor", Manufacturer_Name=Vishay, Mouser Part Number=71-CRCW2512J-8.2K-E3, Datasheet Link=http://www.vishay.com/docs/20035/dcrcwe3.pdf, Height=0.7mm, Manufacturer_Part_Number=CRCW25128K20JNEG, Mouser Price/Stock=http://www.mouser.com/Search/ProductDetail.aspx?qs=Zz5LZibkobV4P8RKYh%2frLA%3d%3d
R11 R12: "Resistor", Manufacturer_Name=Vishay, Mouser Part Number=71-WSL2726L5000FEB, Arrow Part Number=WSL2726L5000FEB, Arrow Price/Stock=https://www.arrow.com/en/products/wsl2726l5000feb/vishay, Datasheet Link=http://www.vishay.com/docs/31057/wslhigh.pdf, Height=4.01mm, Manufacturer_Part_Number=WSL2726L5000FEB, Mouser Price/Stock=https://www.mouser.com/Search/Refine.aspx?Keyword=71-WSL2726L5000FEB
RADJ1: library part RT0805BRD075K05L, "Resistor", Manufacturer_Name=Yageo, Mouser Part Number=603-RT0805BRD075K05L, Datasheet Link=https://www.mouser.at/datasheet/2/447/PYu-RT_1-to-0.01_RoHS_L_11-1669912.pdf, Height=0.7mm, Manufacturer_Part_Number=RT0805BRD075K05L, Mouser Price/Stock=https://www.mouser.at/ProductDetail/Yageo/RT0805BRD075K05L?qs=bQfrgN9vNvwObDVrZ%2FDM5w%3D%3D
RT1: library part ERJ-6ENF4992V, "Resistor", Manufacturer_Name=Panasonic, Mouser Part Number=667-ERJ-6ENF4992V, Datasheet Link=https://industrial.panasonic.com/cdbs/www-data/pdf/RDA0000/AOA0000C84.pdf, Height=0.7mm, Manufacturer_Part_Number=ERJ-6ENF4992V, Mouser Price/Stock=https://www.mouser.com/Search/Refine.aspx?Keyword=667-ERJ-6ENF4992V
S1: "Switch", Manufacturer_Name="Copal Electronics", Datasheet Link=https://www.nidec-copal-electronics.com/e/catalog/switch/cas.pdf, Height=2.5mm, Manufacturer_Part_Number=CAS-D20A1
SW2: library part PTS_647_SK38_SMTR2_LFS, "Switch", Arrow Part Number="PTS 647 SK38 SMTR2 LFS", Manufacturer_Name="C & K COMPONENTS", Arrow Price/Stock=https://www.arrow.com/en/products/pts-647-sk38-smtr2-lfs/ck, Datasheet Link=https://dznh3ojzb2azq.cloudfront.net/products/Tactile/PTS647/documents/datasheet.pdf, Height=3.8mm, Manufacturer_Part_Number="PTS 647 SK38 SMTR2 LFS"
XC1: "Crystal or Oscillator", Manufacturer_Name=ABRACON, Mouser Part Number=815-8W24-8B1UT, Arrow Part Number=ABM8W-24.0000MHZ-8-B1U-T3, Arrow Price/Stock=https://www.arrow.com/en/products/abm8w-24.0000mhz-8-b1u-t3/abracon, Datasheet Link=https://www.mouser.com/datasheet/2/3/ABM8W-1107617.pdf, Height=0.75mm, Manufacturer_Part_Number=ABM8W-24.0000MHZ-8-B1U-T3, Mouser Price/Stock=https://www.mouser.com/Search/Refine.aspx?Keyword=815-8W24-8B1UT

## Free pads (board coordinates)
  round 6 hole 3.4: 2(3.81,3.81) 2(3.81,52.07) 2(95.25,3.81) 2(95.25,52.07)

## Via types
v1: diameter 0.85, hole 0.45, Top Layer to Bottom Layer, 150 vias

## Nets (pads, with @x,y where several pads share a name; then routed paths per layer and width w, separated by ;. In a path a pad name is that pad's centre, name@x,y a point inside that pad or via, vN(x,y) a via of type N, cw(c..) or ccw(c..) an arc to the next point about the centre after c; other vN are vias at no path point)
3V3: C5.1 C8.1 C9.1 C10.1 C11.1 IC3.2 IC3.4 IC11.1 J1.1 J7.5 J8.4 J10.1 L3.1 MCU1.16 MCU1.28 MCU1.32 MCU1.48 MCU1.64 R13.1 S1.1 S1.4 | length 33.1
  Top Layer w0.3: C10.1 34.022,6.144 34.465,6.144 34.731,6.41 MCU1.32 ; MCU1.28 37.31,8.41 v1(37.338,8.382) ; C11.1 37.403,17.426 37.652,17.177 MCU1.16 ; MCU1.48 45.152,4.064 49.441,4.064 50.23,4.853 C8.1 ; MCU1.64 47.781,13.91 48.668,14.797 C9.1
  Top Layer w0.5: v1(32.639,5.969) 32.671,5.937 33.749,5.937 C10.1 ; J1.1@68.505,3.429 J1.1@68.58,3.354 ; v1(68.58,1.143) J1.1
  Top Layer w0.65: v1(37.338,20.066) 37.357,20.047 37.357,18.942 R13.1 37.39,18.909 37.39,17.54 C11.1 ; C9.1 v1(48.768,15.875) ; C8.1 v1(51.308,4.953) ; v1(77.216,15.875) IC11.1 ; v1(90.932,29.083) 90.952,29.063 92.43,29.063 J7.5 ; v1(91.631,15.997) 91.643,15.984 93.119,15.984 J8.4
  Top Layer w0.85: L3.1 v1(33.274,12.192) ; S1.4 49.963,17.681 50.038,17.606 v1(50.038,16.51) ; v1(53.086,16.51) 53.086,17.606 53.161,17.681 S1.1
  Bottom Layer w0.65: v1(90.932,29.083) 90.97,29.045 90.97,28.174 91.326,27.818 92.425,27.818 J10.1
  other v1: 23.749,14.224 25.656,14.224 27.686,14.224 23.749,16.764 27.686,16.764 23.749,19.304 25.656,19.304 27.686,19.304 23.368,21.336 23.368,22.733
+5: C4.1 C6.1 C17.1 D1.2 IC1.7 IC1.13 IC1.14 IC1.15 IC1.16 IC1.17 IC1.18 IC1.22 IC1.43 IC2.5 IC3.3 IC4.3 IC5.3 IC6.2 IC6.5 IC9.3 IC10.3 IC11.8 J2.1 J9.1 | length 18.1
  Top Layer w0.3: IC9.3 17.16,36.202 17.399,35.963 v1(17.399,35.814) ; IC10.3 83.2,36.075 83.439,35.836 v1(83.439,35.687)
  Top Layer w0.4: v1(57.531,5.461) 58.156,5.461 58.39,5.227 J2.1
  Top Layer w0.5: v1(8.89,8.98) 8.89,9.075 9.055,9.24 IC1.7 ; v1(11.176,18.632) 11.176,18.727 11.455,19.006 IC1.22
  Top Layer w0.508: v1(47.879,2.413) IC2.5 ; D1.2 IC6.5 IC6.2 75.002,21.844 75.278,22.12 76.205,22.12 C17.1
  Top Layer w0.65: IC11.8 v1(85.725,15.875)
  Bottom Layer w0.65: J9.1 93.146,15.987 94.727,15.987 v1(94.742,16.002)
  other v1: 14.351,14.478 15.748,14.478 17.145,14.478 14.351,16.129
AGND: C6.2 C7.2 IC1.1 IC1.2 IC1.3 IC1.4 IC1.5 IC1.8 IC1.11 IC1.12 J4.7 J4.8 MCU1.27 RADJ1.2 RT1.2 | length 6.7
  Top Layer w0.3: C7.2 31.467,10.579 32.267,9.779 34.29,9.779 34.576,9.493 34.576,9.115 34.782,8.91 MCU1.27
  Top Layer w0.85: RADJ1.2 v1(12.954,22.86)
  Top Layer w1: C6.2 C6.2@16.628,10.569 ; C7.2@31.232,10.569 C7.2
  other v1: 12.827,8.509
NetC7_1: C7.1 L3.2 MCU1.29 | length 4.9
  Top Layer w0.3: C7.1 31.332,8.889 L3.2 33.654,8.889 34.014,8.529 34.014,8.447 34.551,7.91 MCU1.29
NetC12_1: C12.1 MCU1.7 R13.2 SW2.2 | length 28.8
  Top Layer w0.3: MCU1.7 42.152,15.155 42.427,14.88 44.429,14.88 45.466,13.843 v1(45.466,12.954)
  Top Layer w0.78: C12.1 31.434,13.908 32.131,14.605 33.181,14.605 SW2.2 ; v1(34.163,13.335) 34.15,13.348 34.15,13.445 33.223,14.372 SW2.2 ; R13.2 35.776,18.823 35.766,18.813 34.561,18.813 33.274,17.526 33.274,14.698 SW2.2
  Bottom Layer w0.3: v1(34.163,13.335) 34.217,13.335 35.106,12.446 44.958,12.446 v1(45.466,12.954)
NetC13_1: C13.1 C14.1 C19.1 C24.1 C25.1 D4.1 D5.1 D8.1 IC4.6 IC5.6 | length 1.5
  Top Layer w0.508: C19.1 56.79,21.84 D4.1
NetC13_2: C13.2 C22.1 D7.2 IC4.8 IC7.2 IC7.5 L1.1 Q2.4 Q4.3
NetC14_2: C14.2 C23.1 D6.2 IC5.8 IC8.2 IC8.5 L1.2 Q5.4 Q7.3 | length 0.2
  Top Layer w0.247: C23.1@79.01,37.465 C23.1@79.175,37.63
NetC15_1: C15.1 C16.1 IC6.6 | length 11.3
  Top Layer w0.508: C16.1 66.696,20.32 67.62,19.396 69.506,19.396 69.804,19.694 69.804,20.304 C15.1 70.76,20.32 71.188,20.748 72.131,20.748 IC6.6
NetC15_2: C15.2 D1.1 D2.2 | length 3.1
  Top Layer w0.508: D2.2 D1.1 68.223,21.841 68.223,20.322 C15.2
NetC16_2: C16.2 D3.1 D4.2 | length 3.1
  Top Layer w0.508: D4.2 D3.1 60.6,21.84 C16.2
NetC18_1: C18.1 D2.1 D3.2 | length 3.1
  Top Layer w0.508: D3.2 D2.1 64.41,21.848 C18.1
NetC20_1: C20.1 IC7.6
NetC20_2: C20.2 D7.1 D8.2
NetC21_1: C21.1 IC8.6
NetC21_2: C21.2 D5.2 D6.1
NetC22_2: C22.2 C24.2 IC7.1 IC7.4 R7.1 R8.1
NetC23_2: C23.2 C25.2 IC8.1 IC8.4 R9.1 R10.1 | length 0.4
  Top Layer w0.247: C25.2@68.745,35.76 C25.2@68.892,35.907 ; C23.2@79.575,36.03 C23.2@79.728,35.877
NetC27_1: C27.1 Q2.3 R11.2
NetC28_1: C28.1 Q5.3 R12.1
NetCL1_2: CL1.2 MCU1.5 XC1.1 | length 6.8
  Top Layer w0.3: MCU1.5 43.152,17.427 42.951,17.628 42.951,19.202 43.326,19.577 43.576,19.577 XC1.1 44.126,19.877 CL1.2
NetCL2_2: CL2.2 MCU1.6 XC1.3 | length 4.9
  Top Layer w0.3: CL2.2 41.726,18.477 XC1.3 41.926,18.402 42.351,17.977 42.351,17.339 42.652,17.038 MCU1.6
NetIC4_1: IC4.1 MCU1.38
NetIC4_2: IC4.2 MCU1.39
NetIC4_4: IC4.4 Q4.1
NetIC4_7: IC4.7 Q2.1
NetIC5_1: IC5.1 MCU1.40
NetIC5_2: IC5.2 MCU1.41
NetIC5_4: IC5.4 Q7.1
NetIC5_7: IC5.7 Q5.1
NetIC9_1: IC9.1 MCU1.11 | length 45.2
  Top Layer w0.3: v1(13.97,35.941) 15.113,37.084 IC9.1@15.875,37.084 ; v1(39.243,14.224) 40.152,15.133 MCU1.11
  Bottom Layer w0.3: v1(13.97,35.941) 13.97,27.686 17.526,24.13 28.067,24.13 31.115,21.082 31.115,18.288 35.179,14.224 v1(39.243,14.224)
NetIC9_4: IC9.4 R11.4 | length 3.8
  Top Layer w0.3: IC9.4 17.16,41.093 17.85,41.783 R11.4@18.669,41.783
NetIC9_5: IC9.5 R11.3 | length 3.7
  Top Layer w0.3: R11.3@14.478,41.783 15.17,41.783 15.86,41.093 IC9.5
NetIC10_1: IC10.1 MCU1.8 | length 73.6
  Top Layer w0.3: MCU1.8 41.652,14.99 42.164,14.478 43.053,14.478 v1(43.942,13.589) ; v1(80.645,37.084) IC10.1@81.915,37.084
  Bottom Layer w0.3: v1(43.942,13.589) 44.009,13.656 48.211,13.656 48.773,14.219 54.097,14.219 55.118,15.24 71.628,15.24 75.692,19.304 86.487,19.304 87.757,20.574 87.757,32.512 85.284,34.985 81.22,34.985 80.645,35.56 v1(80.645,37.084)
NetIC10_4: IC10.4 R12.4 | length 3.8
  Top Layer w0.3: IC10.4 83.2,41.093 83.89,41.783 R12.4@84.709,41.783
NetIC10_5: IC10.5 R12.3 | length 3.8
  Top Layer w0.3: R12.3@80.391,41.783 81.21,41.783 81.9,41.093 IC10.5
NetIC11_2: IC11.2 MCU1.59 | length 37.5
  Top Layer w0.3: MCU1.59 48.893,11.41 49.127,11.176 v1(49.276,11.176) ; v1(75.438,12.954) 77.089,14.605 IC11.2
  Bottom Layer w0.3: v1(49.276,11.176) 49.276,8.89 50.546,7.62 63.246,7.62 68.58,12.954 v1(75.438,12.954)
NetIC11_3: IC11.3 MCU1.34 | length 46.7
  Top Layer w0.3: MCU1.34 38.152,3.018 38.354,2.816 v1(38.354,2.667) ; v1(75.438,11.557) 77.216,13.335 IC11.3
  Bottom Layer w0.3: v1(38.354,2.667) 44.213,2.667 47.515,5.969 50.8,5.969 51.943,7.112 63.5,7.112 67.945,11.557 v1(75.438,11.557)
NetIC11_5: IC11.5 J9.4 | length 9
  Top Layer w0.3: IC11.5 v1(87.249,12.065)
  Bottom Layer w0.3: v1(87.249,12.065) 87.328,12.144 93.053,12.144 J9.4
NetIC11_6: IC11.6 J9.3 | length 8.9
  Top Layer w0.3: IC11.6 v1(87.249,13.335)
  Bottom Layer w0.3: v1(87.249,13.335) 87.318,13.404 93.063,13.404 J9.3
NetJ1_2: J1.2 MCU1.49 | length 22.1
  Top Layer w0.3: MCU1.49 52.257,6.41 53.213,7.366 58.674,7.366 59.412,6.628 J1.2
NetJ1_4: J1.4 MCU1.50 | length 25.4
  Top Layer w0.3: MCU1.50 51.995,6.91 52.959,7.874 58.928,7.874 59.69,7.112 66.167,7.112 67.564,8.509 69.069,8.509 69.85,7.728 J1.4
NetJ1_6: J1.6 MCU1.56 | length 32.8
  Top Layer w0.3: MCU1.56 46.397,9.91 45.974,9.487 45.974,6.145 46.15,5.969 v1(52.959,5.969) ; v1(65.786,8.001) 66.802,9.017 69.831,9.017 71.12,7.728 J1.6
  Bottom Layer w0.3: v1(52.959,5.969) 53.594,6.604 64.389,6.604 v1(65.786,8.001)
NetJ4_1: J4.1 MCU1.18 | length 33.3
  Top Layer w0.3: MCU1.18 39.676,13.41 41.275,11.811 41.275,9.737 40.047,8.509 v1(40.005,8.509)
  Bottom Layer w0.3: J4.1 20.32,4.699 24.384,8.763 34.022,8.763 35.292,7.493 38.989,7.493 v1(40.005,8.509)
NetJ4_2: J4.2 MCU1.19 | length 31.7
  Top Layer w0.3: MCU1.19 39.414,12.91 40.767,11.557 40.767,10.541 v1(40.005,9.779)
  Bottom Layer w0.3: J4.2 19.05,4.699 23.622,9.271 39.497,9.271 v1(40.005,9.779)
NetJ4_3: J4.3 MCU1.20 | length 30.6
  Top Layer w0.3: MCU1.20 38.644,12.41 v1(40.005,11.049)
  Bottom Layer w0.3: J4.3 17.78,4.699 22.86,9.779 38.735,9.779 v1(40.005,11.049)
NetJ4_4: J4.4 MCU1.21 | length 29.2
  Top Layer w0.3: MCU1.21 37.874,11.91 v1(38.735,11.049)
  Bottom Layer w0.3: J4.4 16.554,3.854 16.554,4.743 22.098,10.287 37.973,10.287 v1(38.735,11.049)
NetJ4_5: J4.5 MCU1.22 | length 27.8
  Top Layer w0.3: MCU1.22 36.955,11.41 37.316,11.049 v1(37.465,11.049)
  Bottom Layer w0.3: J4.5 15.24,4.826 21.209,10.795 37.062,10.795 37.316,11.049 v1(37.465,11.049)
NetJ4_6: J4.6 MCU1.42 | length 31.7
  Top Layer w0.3: v1(40.64,1.524) 42.152,3.036 MCU1.42
  Bottom Layer w0.3: J4.6 13.97,2.921 14.351,2.54 31.115,2.54 32.131,1.524 v1(40.64,1.524)
NetJ7_2: J7.2 MCU1.52 | length 61.4
  Top Layer w0.3: MCU1.52 51.471,7.91 52.451,8.89 59.309,8.89 59.563,9.144 64.008,9.144 65.405,10.541 70.739,10.541 71.628,9.652 88.9,9.652 90.043,10.795 90.043,24.638 90.698,25.293 J7.2
NetJ7_3: J7.3 MCU1.58 | length 62.2
  Top Layer w0.3: MCU1.58 48.272,10.91 48.708,10.474 49.717,10.474 v1(50.419,11.176) ; v1(57.15,9.652) 63.754,9.652 65.151,11.049 70.993,11.049 71.882,10.16 88.47,10.16 89.535,11.225 89.535,24.892 91.186,26.543 J7.3
  Bottom Layer w0.3: v1(50.419,11.176) 55.626,11.176 v1(57.15,9.652)
NetJ7_4: J7.4 MCU1.53 | length 62.6
  Top Layer w0.3: MCU1.53 51.209,8.41 52.197,9.398 55.499,9.398 56.769,10.668 64.008,10.668 64.897,11.557 71.247,11.557 72.136,10.668 88.265,10.668 89.027,11.43 89.027,25.908 90.912,27.793 J7.4
NetJ8_2: J8.2 MCU1.51 | length 51.4
  Top Layer w0.3: MCU1.51 51.733,7.41 52.705,8.382 59.182,8.382 59.944,7.62 64.008,7.62 65.913,9.525 70.104,9.525 71.12,8.509 90.043,8.509 91.821,10.287 91.821,12.712 92.581,13.472 J8.2
NetJ8_3: J8.3 MCU1.60 | length 52.6
  Top Layer w0.3: MCU1.60 51.28,11.91 v1(51.308,11.938) ; v1(60.706,8.382) 64.008,8.382 65.659,10.033 70.358,10.033 71.374,9.017 89.789,9.017 91.313,10.541 91.313,13.454 92.581,14.722 J8.3
  Bottom Layer w0.3: v1(51.308,11.938) 57.15,11.938 v1(60.706,8.382)
NetJ10_2: J10.2 MCU1.55 | length 55.7
  Top Layer w0.3: MCU1.55 50.685,9.41 51.689,10.414 54.991,10.414 56.769,12.192 v1(61.468,12.192)
  Bottom Layer w0.3: v1(61.468,12.192) 63.754,12.192 65.786,14.224 73.279,14.224 76.962,17.907 88.138,17.907 89.535,19.304 89.535,24.892 91.186,26.543 J10.2
NetJ10_3: J10.3 MCU1.54 | length 55.4
  Top Layer w0.3: MCU1.54 50.947,8.91 51.943,9.906 55.245,9.906 56.769,11.43 v1(62.484,11.43)
  Bottom Layer w0.3: v1(62.484,11.43) 63.754,11.43 66.04,13.716 73.533,13.716 77.216,17.399 88.392,17.399 90.043,19.05 90.043,24.638 90.698,25.293 J10.3
NetLED1_2: LED1.2 R3.2 | length 1.6
  Top Layer w0.3: LED1.2 R3.2
NetLED2_2: LED2.2 R4.2 | length 1.6
  Top Layer w0.3: LED2.2 R4.2
NetLED3_2: LED3.2 R5.2 | length 4.7
  Top Layer w0.3: LED3.2 26.289,3.761 26.465,3.937 28.702,3.937 29.337,3.302 R5.2
NetLED4_2: LED4.2 R6.2 | length 3.4
  Top Layer w0.3: LED4.2 28.653,3.163 28.829,2.987 28.829,1.778 29.083,1.524 R6.2
NetMCU1_9: MCU1.9 R15.2 R17.1 | length 64.2
  Top Layer w0.3: MCU1.9 41.152,14.855 v1(42.418,13.589) ; R17.1@84.328,30.353 R17.1 84.328,31.115 ; R15.2 84.328,31.115 ; v1(85.852,31.115) 84.328,31.115
  Bottom Layer w0.3: v1(42.418,13.589) 43.688,14.859 53.848,14.859 54.864,15.875 71.374,15.875 75.438,19.939 86.233,19.939 87.122,20.828 87.122,29.845 v1(85.852,31.115)
NetMCU1_10: MCU1.10 R14.2 R16.1 | length 39.9
  Top Layer w0.3: v1(14.859,30.353) 16.002,30.353 ; R16.1 16.002,30.353 ; R14.2 16.002,30.353 ; v1(40.64,14.224) 40.652,14.236 MCU1.10
  Bottom Layer w0.3: v1(14.859,30.353) 14.859,27.559 17.78,24.638 28.321,24.638 31.623,21.336 31.623,18.542 35.179,14.986 39.878,14.986 v1(40.64,14.224)
NetMCU1_26: MCU1.26 R4.1 | length 20.5
  Top Layer w0.3: R4.1 24.6,6.477 26.289,6.477 28.194,4.572 36.195,4.572 38.227,6.604 38.227,9.017 37.834,9.41 MCU1.26
NetMCU1_30: MCU1.30 R3.1 | length 19.1
  Top Layer w0.3: R3.1 22.733,7.038 23.061,7.366 26.924,7.366 29.21,5.08 35.941,5.08 37.084,6.223 37.084,7.234 36.908,7.41 MCU1.30
NetMCU1_33: MCU1.33 R5.1 | length 7
  Top Layer w0.3: R5.1 37.476,3.302 37.652,3.478 MCU1.33
NetMCU1_36: MCU1.36 R6.1 | length 10
  Top Layer w0.3: R6.1 38.481,1.524 39.152,2.195 MCU1.36
NetMCU1_57: MCU1.57 R1.2 | length 8
  Top Layer w0.3: MCU1.57 48.01,10.41 48.514,9.906 50.419,9.906 52.832,12.319 R1.2
NetMCU1_61: MCU1.61 R2.2 | length 4.8
  Top Layer w0.3: MCU1.61 50.51,12.41 50.958,12.858 50.958,13.174 51.208,13.424 R2.2
NetR1_1: R1.1 S1.2 | length 5.5
  Top Layer w0.3: R1.1 52.732,15.024 52.482,15.274 52.482,15.374 52.07,15.786 52.07,18.389 53.112,19.431 S1.2
NetR2_1: R2.1 S1.5 | length 5.2
  Top Layer w0.3: S1.5 50.012,19.431 51.054,18.389 51.054,15.274 51.304,15.024 R2.1
PGND: C1.2 C2.2 C3.2 C4.2 C5.2 C8.2 C9.2 C10.2 C11.2 C12.2 C17.2 C18.2 C19.2 C27.2 C28.2 CL1.1 CL2.1 IC1.19 IC1.29 IC1.30 IC1.31 IC1.32 IC1.33 IC1.41 IC2.2 IC3.1 IC4.9 IC5.9 IC6.1 IC6.4 IC9.2 IC10.2 IC11.4 IC11.7 J1.3 J1.5 J1.9 J2.5 J3.1 J3.2 J3.3 J3.4 J4.9 J4.10 J6.1 J6.2 J6.3 J6.4 J7.1 J7.MP1 J7.MP2 J8.1 J8.MP1 J8.MP2 J9.2 J9.MP1 J9.MP2 J10.4 J10.MP1 LED1.1 LED2.1 LED3.1 LED4.1 MCU1.15 MCU1.31 MCU1.47 MCU1.63 P3.1 P4.1 Q4.4 Q7.4 R7.2 R8.2 R9.2 R10.2 R16.2 R17.2 S1.3 S1.6 SW2.3 SW2.4 XC1.2 XC1.4 | length 77.5
  Top Layer w0.3: v1(16.256,35.814) 16.256,35.963 16.51,36.217 IC9.2 ; C10.2 34.022,7.064 34.465,7.064 34.619,6.91 MCU1.31 ; C11.2 36.003,15.94 37.338,14.605 37.973,14.605 38.152,14.784 MCU1.15 ; MCU1.47 44.652,5.165 44.948,5.461 47.244,5.461 v1(47.752,4.953) ; MCU1.63 48.755,13.41 C9.2 ; IC2.2 v1(52.959,2.413) ; v1(82.296,35.687) 82.296,35.836 82.55,36.09 IC10.2
  Top Layer w0.4: CL2.1 v1(39.878,20.955) ; v1(45.974,17.399) CL1.1 ; J2.5 60.99,5.075 61.29,5.375 61.636,5.375 v1(61.722,5.461)
  Top Layer w0.5: v1(32.639,7.366) 32.67,7.335 33.751,7.335 C10.2 ; C19.2 C19.2@58.39,20.52 ; v1(69.848,1.143) 69.849,1.144 69.849,3.277 J1.3 ; v1(71.12,1.143) J1.5 ; v1(73.66,1.143) J1.9 73.66,3.354 J1.9@73.735,3.429
  Top Layer w0.508: C19.2 v1(59.203,20.32) ; C18.2 v1(66.823,23.368) ; IC6.1 75.002,20.794 75.244,20.552 76.205,20.552 C17.2
  Top Layer w0.65: v1(34.925,17.526) C11.2 ; v1(47.752,4.953) C8.2 ; C9.2 48.799,13.366 49.88,13.366 v1(49.911,13.335) ; v1(77.343,12.065) IC11.4 ; IC11.7 v1(85.725,14.605) ; v1(90.932,24.003) 90.952,24.023 92.43,24.023 J7.1 ; J8.1 93.146,12.207 94.727,12.207 v1(94.742,12.192)
  Top Layer w0.78: SW2.3 30.086,19.834 30.086,18.428 v1(30.099,18.415) ; C12.2 30.034,14.636 SW2.4 30.086,14.71 30.086,16.116 v1(30.099,16.129)
  Top Layer w0.8: v1(21.59,1.651) 21.6,1.661 22.731,1.661 LED1.1 LED2.1 LED3.1 LED4.1
  Top Layer w0.85: v1(38.735,17.399) v1(38.735,21.971) v1(42.926,21.971) v1(47.117,21.971) v1(47.117,17.399) ; S1.6 49.963,21.181 50.038,21.256 v1(50.038,22.352) ; v1(53.213,22.352) 53.213,21.256 53.288,21.181 S1.3
  Bottom Layer w0.5: J9.2@93.126,14.727 J9.2
  Bottom Layer w0.65: v1(90.932,24.003) 90.952,24.023 92.43,24.023 J10.4 ; J9.2 93.136,14.727 94.737,14.727 v1(94.742,14.732)
  other v1: 96.431,9.972 96.431,18.222 38.735,19.685 47.117,19.685 15.875,20.701 17.145,20.701 18.034,21.971 2.54,22.352 2.54,23.368 2.54,24.384 2.54,25.908 2.54,26.924 39.116,27.432 40.386,27.432 41.656,27.432 61.976,27.432 63.246,27.432 64.516,27.432 2.54,27.94 39.116,29.21 41.656,29.21 61.976,29.21 64.516,29.21 2.54,29.718 2.54,30.734 39.116,30.988 40.386,30.988 41.656,30.988 61.976,30.988 63.246,30.988 64.516,30.988 95.75,31.293 2.54,31.75 26.162,40.64 29.718,40.64 69.342,40.64 72.898,40.64 26.162,42.164 29.718,42.164 69.342,42.164 72.898,42.164 26.162,43.688 29.718,43.688 69.342,43.688 72.898,43.688
RT: IC1.9 RT1.1 | length 3.2
  Top Layer w0.5: IC1.9 10.655,7.125 RT1.1@10.659,7.121
  Top Layer w0.508: RT1.1@10.659,7.121 RT1.1@10.668,7.112
RTSEL: IC1.10
USB-Con-D_N: IC2.1 J2.2 | length 12.7
  Top Layer w0.247: IC2.1 52.964,1.463 53.74,2.239 54.294,2.239 54.958,2.904 54.958,5.174 56.261,6.477 58.293,6.477 59.191,5.579 59.191,5.098 59.117,5.024 59.117,4.276 J2.2
USB-Con-D_P: IC2.3 J2.3 | length 13.3
  Top Layer w0.247: IC2.3 52.964,3.363 53.74,2.587 54.149,2.587 54.61,3.048 54.61,5.319 56.117,6.825 58.437,6.825 59.539,5.724 59.539,5.098 59.613,5.024 59.613,4.276 J2.3
USB-D_N: IC2.6 MCU1.45 | length 7.5
  Top Layer w0.247: MCU1.45 43.679,4.395 43.679,3.551 43.69,3.539 43.69,3.081 44.627,2.143 47.09,2.143 47.771,1.463 IC2.6
USB-D_P: IC2.4 MCU1.46 | length 6.8
  Top Layer w0.247: MCU1.46 44.125,4.395 44.125,3.551 44.114,3.539 44.114,3.257 44.803,2.568 46.986,2.568 47.131,2.713 47.131,2.723 47.771,3.363 IC2.4
VADJ: IC1.24 RADJ1.1 | length 2.8
  Top Layer w0.5: IC1.24 9.855,22.809 RADJ1.1